# EAGLE board ArduinoFio_Panel_v10a (EAGLE 7.5.0), part 1 of 3
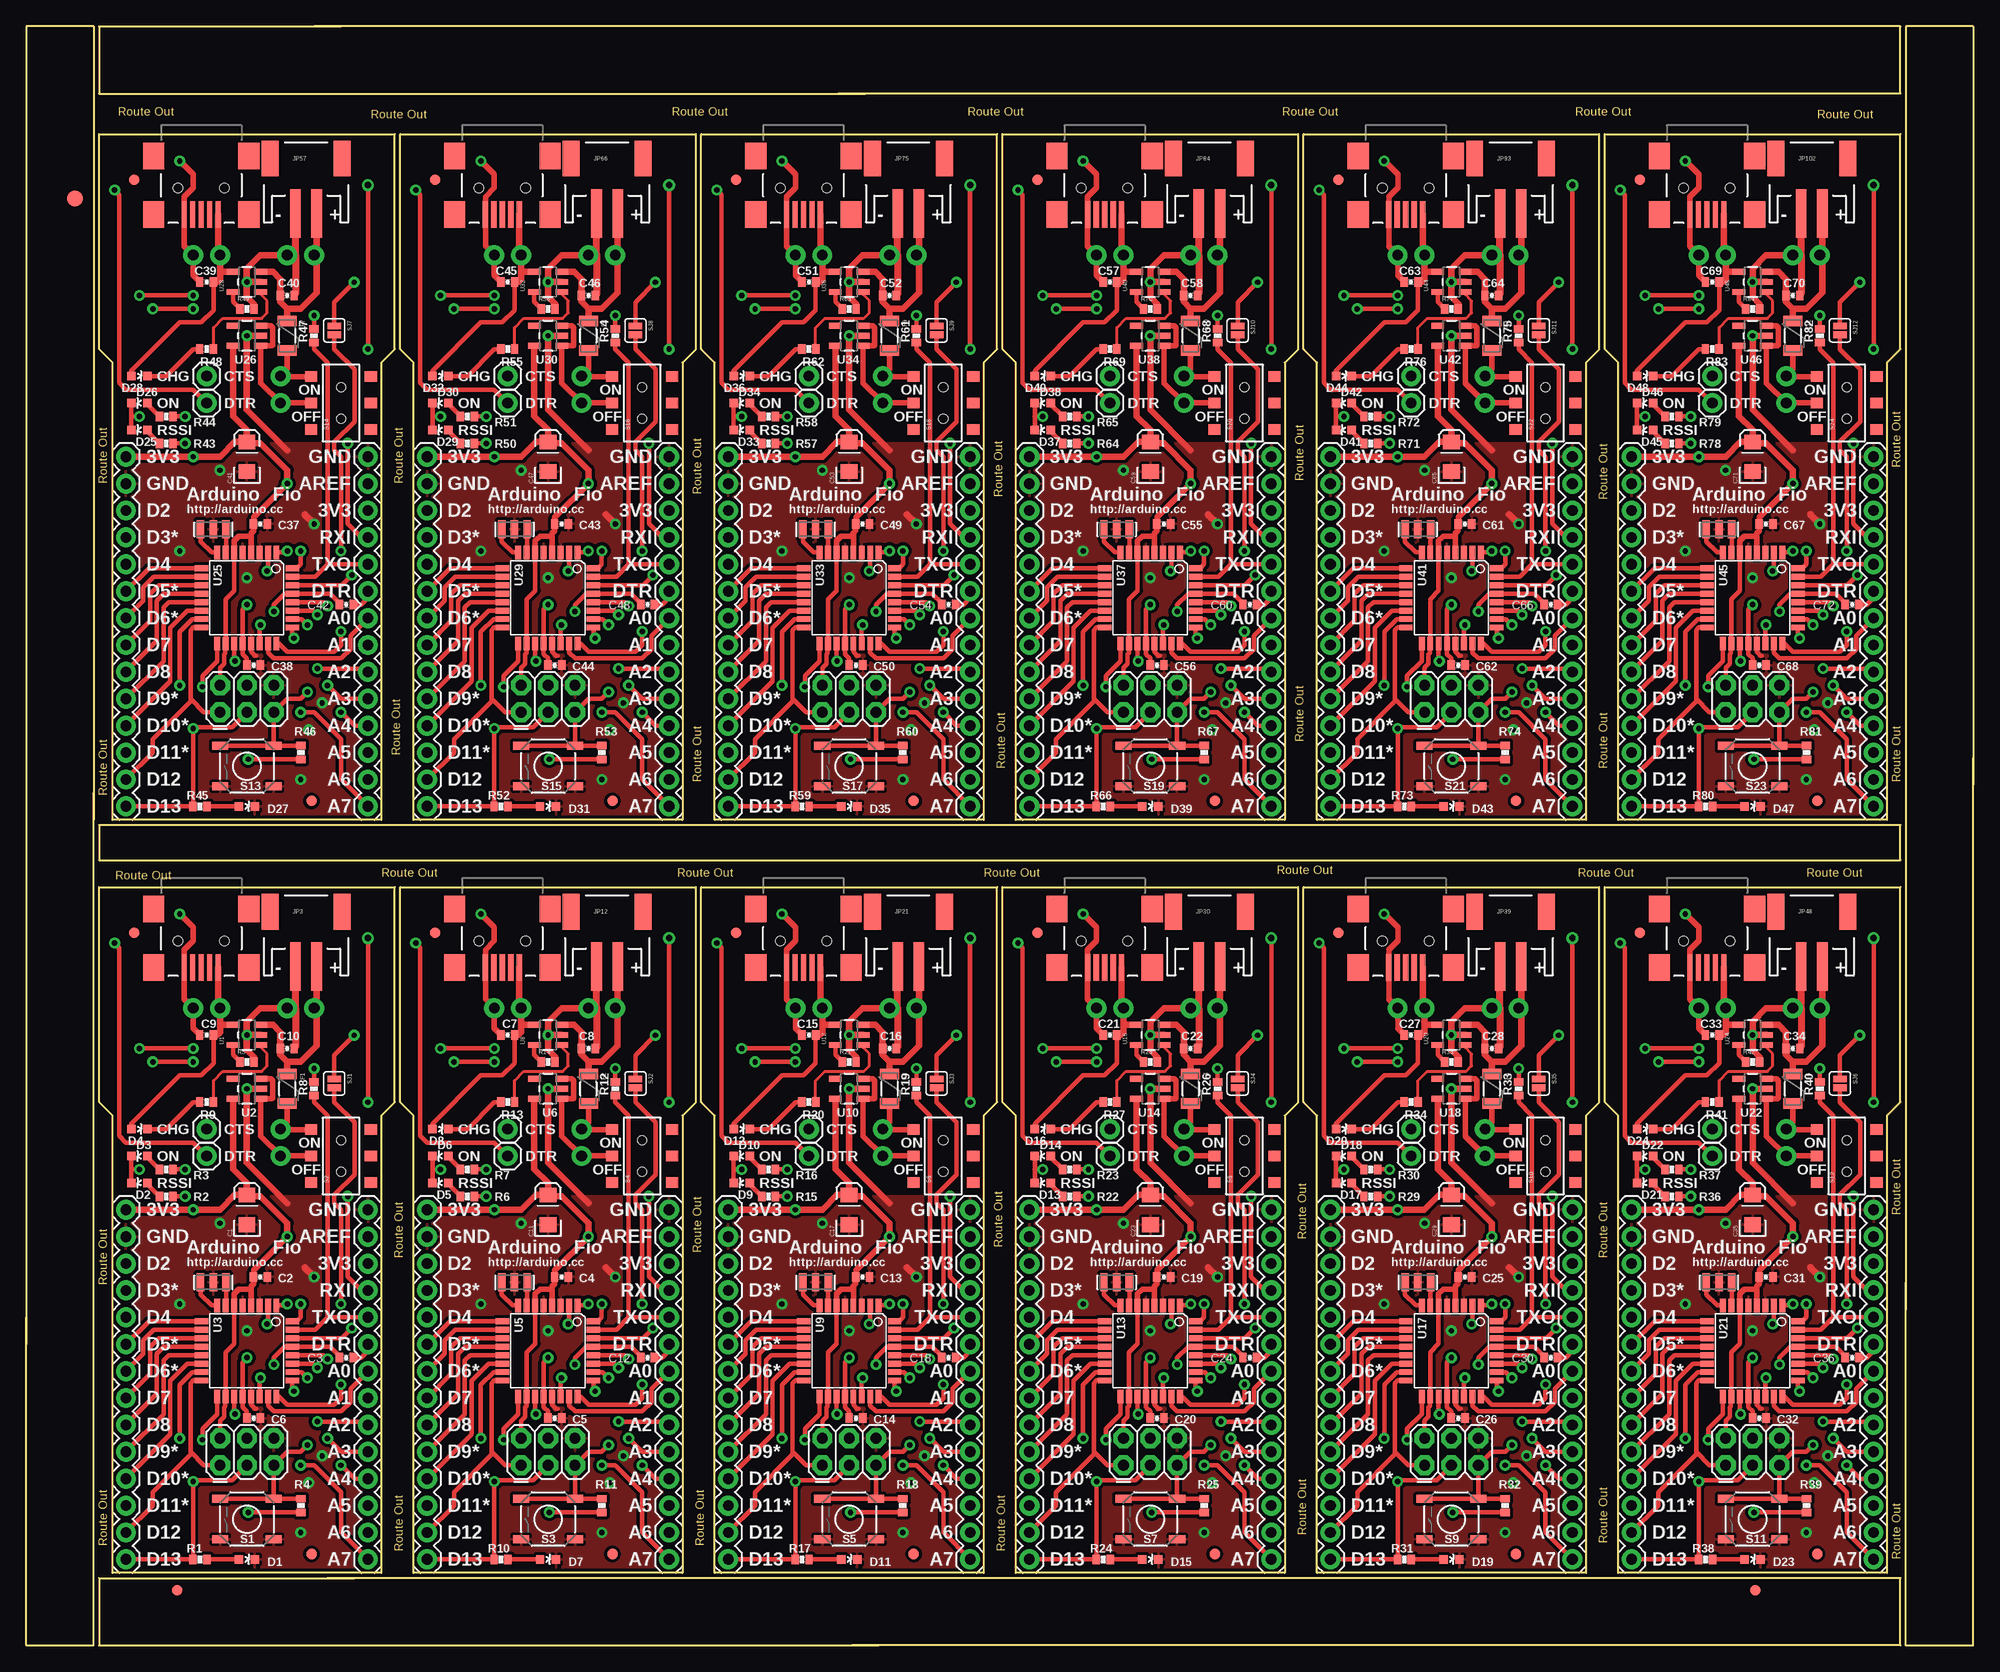
[diagram p0: board, top side]
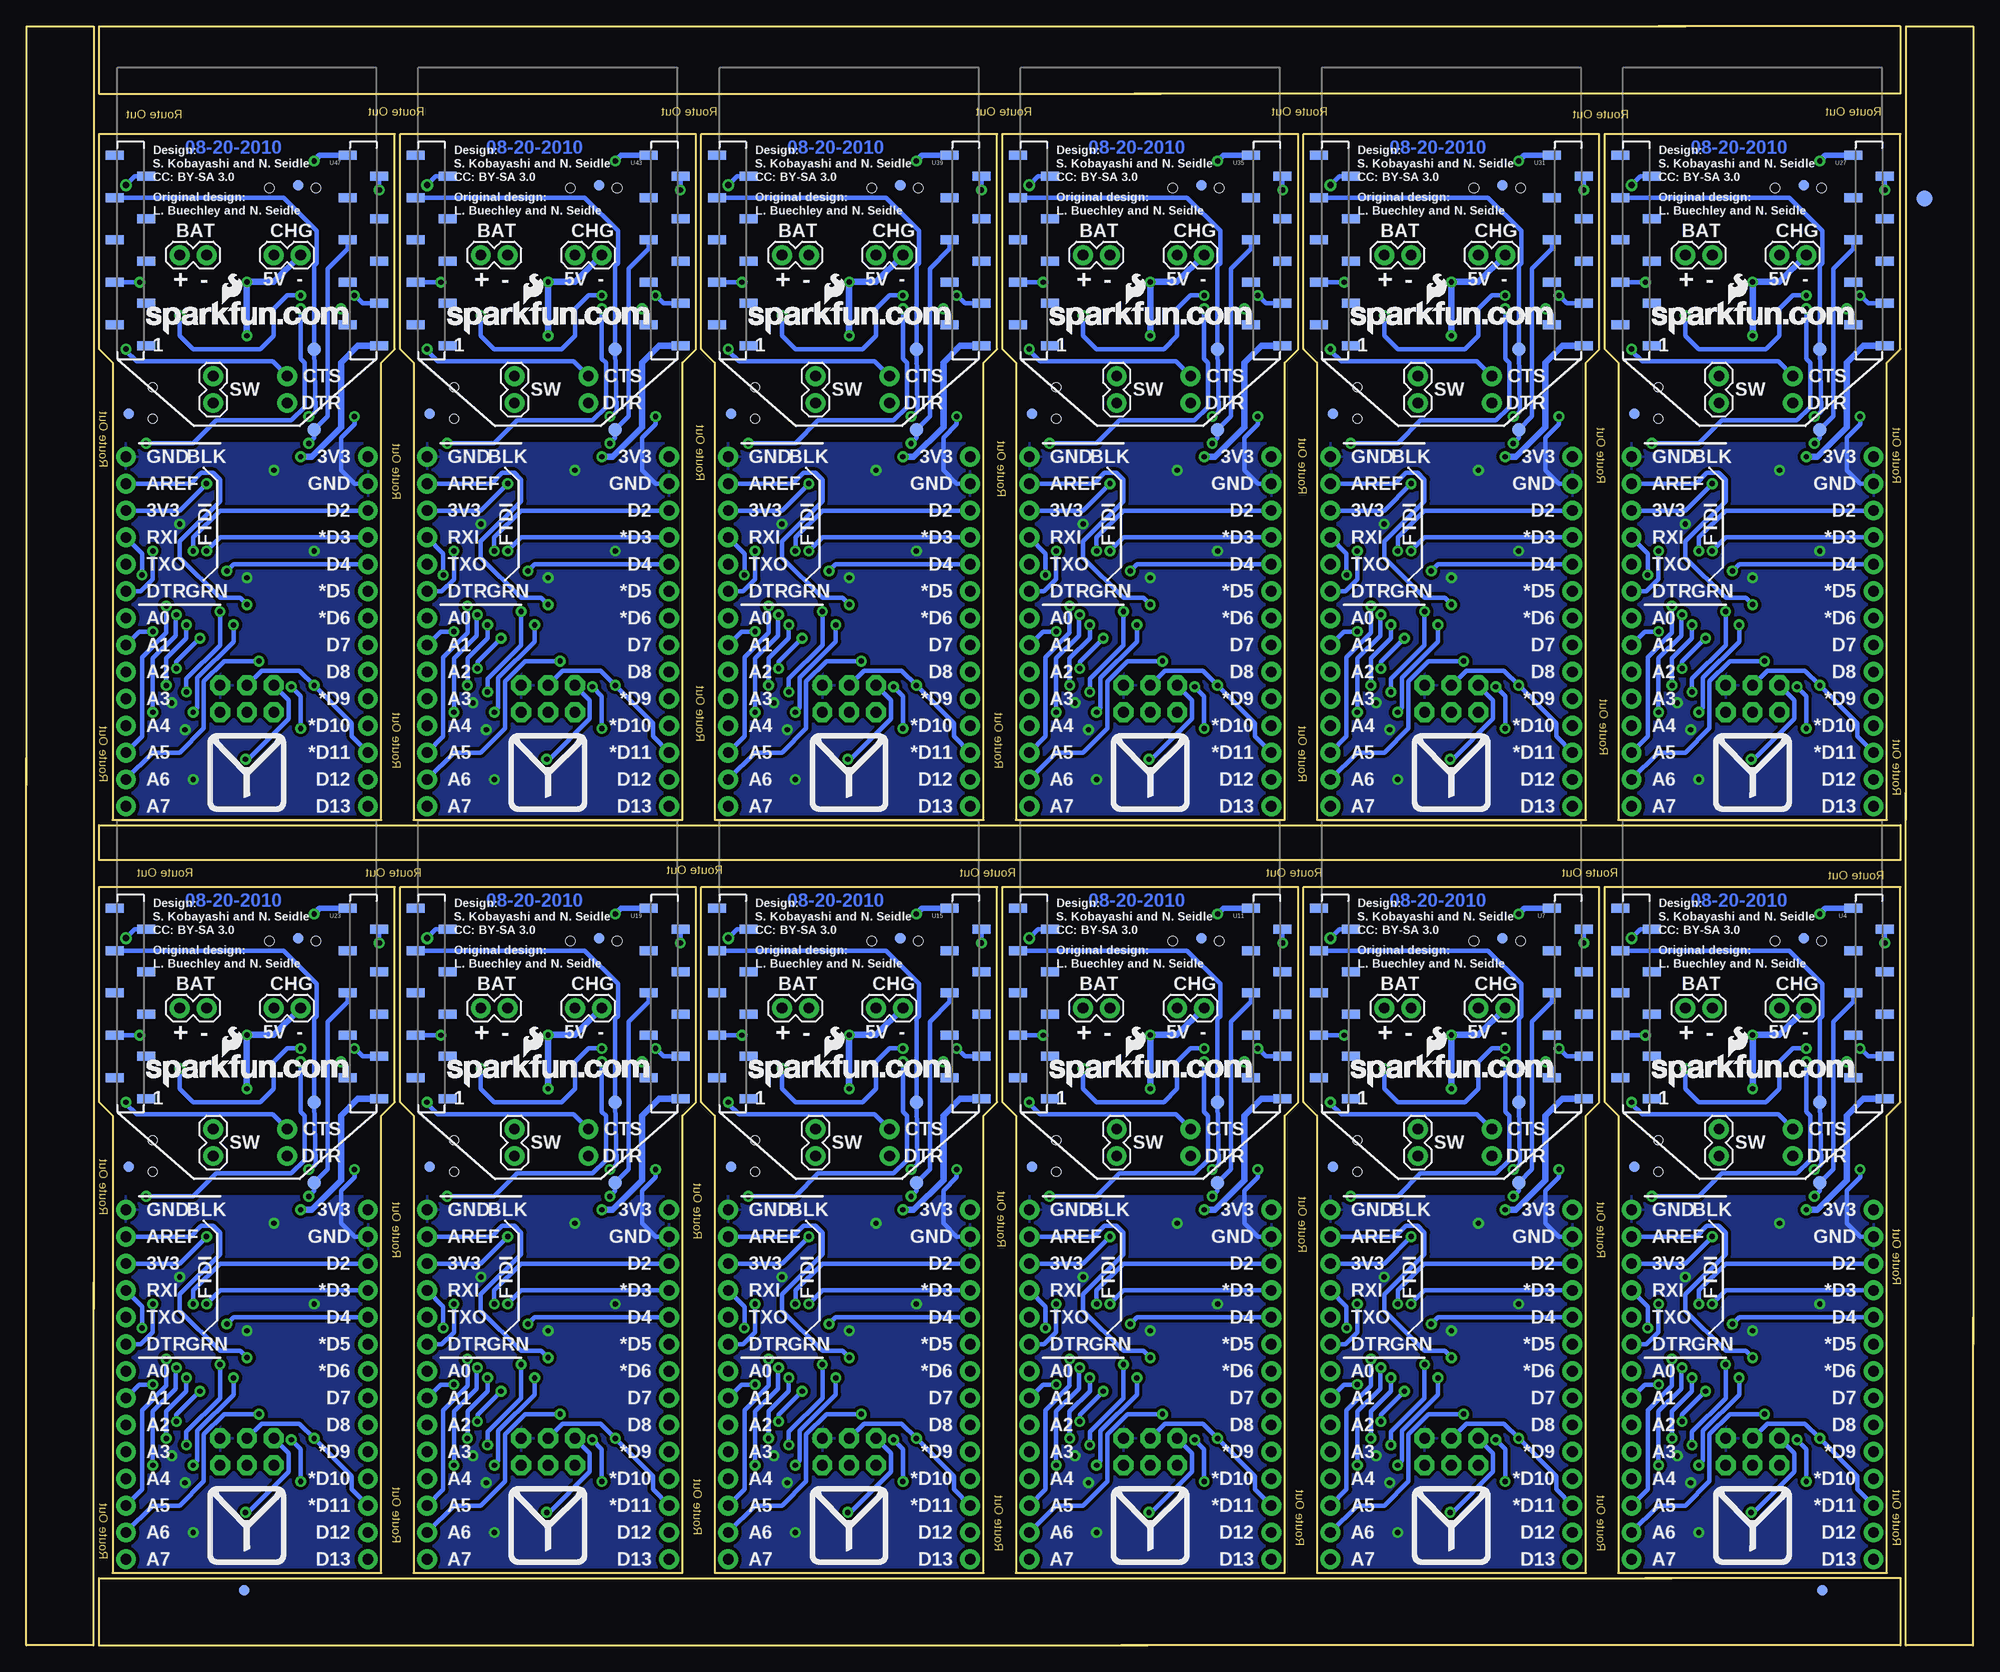
[diagram p1: board, bottom side, seen from below]

Size 183.9 x 152.91 mm. Coordinates in mm from the lower left corner, seen from the top.
Outline: 6.35,80.52 6.35,0 0,0 0,30.99
Outline: 0,28.45 0,152.91 6.35,152.91 6.35,77.98
Outline: 80.52,0 6.86,0 6.86,6.35 30.99,6.35
Outline: 28.45,6.35 177.04,6.35 177.04,0 77.98,0
Outline: 183.9,83.82 183.9,0 177.55,0 177.55,34.29
Outline: 177.55,31.75 177.55,152.91 183.9,152.91 183.9,81.28
Outline: 27.18,152.91 177.04,152.91 177.04,146.56 76.71,146.56
Outline: 79.25,146.56 6.86,146.56 6.86,152.91 29.72,152.91
Outline: 33.53,50.04 33.53,6.86 8.13,6.86 8.13,50.04 6.86,51.31 6.86,71.63 34.8,71.63 34.8,51.31 33.53,50.04
Outline: 61.98,50.04 61.98,6.86 36.58,6.86 36.58,50.04 35.31,51.31 35.31,71.63 63.25,71.63 63.25,51.31 61.98,50.04
Outline: 90.42,50.04 90.42,6.86 65.02,6.86 65.02,50.04 63.75,51.31 63.75,71.63 91.69,71.63 91.69,51.31 90.42,50.04
Outline: 118.87,50.04 118.87,6.86 93.47,6.86 93.47,50.04 92.2,51.31 92.2,71.63 120.14,71.63 120.14,51.31 118.87,50.04
Outline: 147.32,50.04 147.32,6.86 121.92,6.86 121.92,50.04 120.65,51.31 120.65,71.63 148.59,71.63 148.59,51.31 147.32,50.04
Outline: 175.77,50.04 175.77,6.86 150.37,6.86 150.37,50.04 149.1,51.31 149.1,71.63 177.04,71.63 177.04,51.31 175.77,50.04
Outline: 33.53,121.16 33.53,77.98 8.13,77.98 8.13,121.16 6.86,122.43 6.86,142.75 34.8,142.75 34.8,122.43 33.53,121.16
Outline: 61.98,121.16 61.98,77.98 36.58,77.98 36.58,121.16 35.31,122.43 35.31,142.75 63.25,142.75 63.25,122.43 61.98,121.16
Outline: 90.42,121.16 90.42,77.98 65.02,77.98 65.02,121.16 63.75,122.43 63.75,142.75 91.69,142.75 91.69,122.43 90.42,121.16
Outline: 118.87,121.16 118.87,77.98 93.47,77.98 93.47,121.16 92.2,122.43 92.2,142.75 120.14,142.75 120.14,122.43 118.87,121.16
Outline: 147.32,121.16 147.32,77.98 121.92,77.98 121.92,121.16 120.65,122.43 120.65,142.75 148.59,142.75 148.59,122.43 147.32,121.16
Outline: 175.77,121.16 175.77,77.98 150.37,77.98 150.37,121.16 149.1,122.43 149.1,142.75 177.04,142.75 177.04,122.43 175.77,121.16
Outline: 6.86,74.17 177.04,74.17 177.04,77.47 6.86,77.47 6.86,74.17
Copper layers (1*16): Top 0.035mm / dielectric 1.5mm / Bottom 0.035mm
Design rules "SparkFun": minimum track width 8mil, minimum drill 20mil, track to track 8mil, track to pad 8mil, pad to pad 8mil, via to via 8mil, smd to smd 8mil, copper to edge 8mil, drill to drill 8mil, minimum pad ring 12mil, minimum via ring 10mil, stop-mask expansion 4mil, vias tented up to drill 20mil, thermal gap 10mil
Net classes: 0 Default: width 0.203 mm; 1 VCC: width 0.381 mm; 2 LEDPower: width 0.203 mm; 3 ButtonSignal: width 0.203 mm

## Footprints (pad centres in the part's own frame; a part is rotated, then mirrored left to right if it is on the bottom)
EIA3216 = smd 1.4 x 1.6: A 1.4,0; C -1.4,0
0402-CAP = smd 0.7 x 0.9: 1 -0.65,0; 2 0.65,0
LED-0603 = smd 0.8 x 0.8: A 0,-0.75; C 0,0.75
FIDUCIAL-1.5X3 = smd 1.5 x 1.5: 1 0,0
FIDUCIAL-1X2 = smd 1 x 1: 1 0,0
PTC-1206 = smd 1 x 1.8: 1 -1.4,0; 2 1.4,0
1X14 = drill 1.016 pad 1.88: 1 0,0; 2 2.54,0; 3 5.08,0; 4 7.62,0; 5 10.16,0; 6 12.7,0; 7 15.24,0; 8 17.78,0; 9 20.32,0; 10 22.86,0; 11 25.4,0; 12 27.94,0; 13 30.48,0; 14 33.02,0
1X02 = drill 1.016 pad 1.88: 1 0,0; 2 2.54,0
JST-2-SMD = smd 1 x 4.6: 1 -1,-3.7; 2 1,-3.7 | smd 1.6 x 3.4: NC1 -3.4,1.5; NC2 3.4,1.5
2X3 = drill 1.016 pad 1.88 octagon: 1 0,0; 2 0,2.54; 3 2.54,0; 4 2.54,2.54; 5 5.08,0; 6 5.08,2.54
1X01 = drill 1.016 pad 1.88: 1 0,0
0402-RES = smd 0.7 x 0.9: 1 -0.65,0; 2 0.65,0
TACTILE_SWITCH_SMD = smd 1.524 x 0.762: 1 -2.54,1.905; 2 2.54,1.905; 3 -2.54,-1.905; 4 2.54,-1.905
AYZ0202 = smd 1 x 1.15: 1 -2.5,2.825; 2 0,2.825; 3 2.5,2.825; 4 -2.5,-2.825; 5 0,-2.825; 6 2.5,-2.825 | hole 0.85: 1.5,0; -1.5,0
SJ_2S = smd 0.635 x 1.27: 1 -0.412,0; 2 0.412,0
PAD.03X.05 = smd 1.27 x 1.27: P$1 0,0
SOT23-5 = smd 0.55 x 1.2: 1 -0.95,-1.3; 2 0,-1.3; 3 0.95,-1.3; 4 0.95,1.3; 5 -0.95,1.3
TQFP32-08 = smd 1.27 x 0.559: 1 -4.293,2.8; 2 -4.293,2; 3 -4.293,1.2; 4 -4.293,0.4; 5 -4.293,-0.4; 6 -4.293,-1.2; 7 -4.293,-2; 8 -4.293,-2.8; 17 4.293,-2.8; 18 4.293,-2; 19 4.293,-1.2; 20 4.293,-0.4; 21 4.293,0.4; 22 4.293,1.2; 23 4.293,2; 24 4.293,2.8 | smd 0.559 x 1.27: 9 -2.8,-4.293; 10 -2,-4.293; 11 -1.2,-4.293; 12 -0.4,-4.293; 13 0.4,-4.293; 14 1.2,-4.293; 15 2,-4.293; 16 2.8,-4.293; 25 2.8,4.293; 26 2,4.293; 27 1.2,4.293; 28 0.4,4.293; 29 -0.4,4.293; 30 -1.2,4.293; 31 -2,4.293; 32 -2.8,4.293
XBEE-SMD = smd 1.7 x 0.85: 1 -12.5,20; 2 -9.5,18; 3 -12.5,16; 4 -9.5,14; 5 -12.5,12; 6 -9.5,10; 7 -12.5,8; 8 -9.5,6; 9 -12.5,4; 10 -9.5,2; 11 12.5,2; 12 9.5,4; 13 12.5,6; 14 9.5,8; 15 12.5,10; 16 9.5,12; 17 12.5,14; 18 9.5,16; 19 12.5,18; 20 9.5,20
USB-MINIB = smd 2.5 x 0.5: D+ 2.5,0; D- 2.5,0.8; GND 2.5,-1.6; ID 2.5,-0.8; VBUS 2.5,1.6 | smd 2.5 x 2: MTN1 -3,4.5; MTN2 2.5,4.5; MTN3 -3,-4.5; MTN4 2.5,-4.5 | hole 0.9: 0,2.2; 0,-2.2
RESONATOR-SMD = smd 0.7 x 1.7: 1 -1.2,0; 2 0,0; 3 1.2,0

## Placement (x,y rotation side)
C1  10uF  [EIA3216]  20.83,41.15 90 top
C2  0.1uF  [0402-CAP]  22.1,34.8 0 top
C3  0.1uF  [0402-CAP]  30.23,27.18 180 top
C4  0.1uF  [0402-CAP]  50.55,34.8 0 top
C5  0.1uF  [0402-CAP]  49.91,21.46 0 top
C6  0.1uF  [0402-CAP]  21.46,21.46 0 top
C7  4.7uF  [0402-CAP]  45.47,57.66 180 top
C8  4.7uF  [0402-CAP]  53.09,56.39 0 top
C9  4.7uF  [0402-CAP]  17.02,57.66 180 top
C10  4.7uF  [0402-CAP]  24.64,56.39 0 top
C11  10uF  [EIA3216]  49.28,41.15 90 top
C12  0.1uF  [0402-CAP]  58.67,27.18 180 top
C13  0.1uF  [0402-CAP]  78.99,34.8 0 top
C14  0.1uF  [0402-CAP]  78.36,21.46 0 top
C15  4.7uF  [0402-CAP]  73.91,57.66 180 top
C16  4.7uF  [0402-CAP]  81.53,56.39 0 top
C17  10uF  [EIA3216]  77.72,41.15 90 top
C18  0.1uF  [0402-CAP]  87.12,27.18 180 top
C19  0.1uF  [0402-CAP]  107.44,34.8 0 top
C20  0.1uF  [0402-CAP]  106.81,21.46 0 top
C21  4.7uF  [0402-CAP]  102.36,57.66 180 top
C22  4.7uF  [0402-CAP]  109.98,56.39 0 top
C23  10uF  [EIA3216]  106.17,41.15 90 top
C24  0.1uF  [0402-CAP]  115.57,27.18 180 top
C25  0.1uF  [0402-CAP]  135.89,34.8 0 top
C26  0.1uF  [0402-CAP]  135.25,21.46 0 top
C27  4.7uF  [0402-CAP]  130.81,57.66 180 top
C28  4.7uF  [0402-CAP]  138.43,56.39 0 top
C29  10uF  [EIA3216]  134.62,41.15 90 top
C30  0.1uF  [0402-CAP]  144.02,27.18 180 top
C31  0.1uF  [0402-CAP]  164.34,34.8 0 top
C32  0.1uF  [0402-CAP]  163.7,21.46 0 top
C33  4.7uF  [0402-CAP]  159.26,57.66 180 top
C34  4.7uF  [0402-CAP]  166.88,56.39 0 top
C35  10uF  [EIA3216]  163.07,41.15 90 top
C36  0.1uF  [0402-CAP]  172.47,27.18 180 top
C37  0.1uF  [0402-CAP]  22.1,105.92 0 top
C38  0.1uF  [0402-CAP]  21.46,92.58 0 top
C39  4.7uF  [0402-CAP]  17.02,128.78 180 top
C40  4.7uF  [0402-CAP]  24.64,127.51 0 top
C41  10uF  [EIA3216]  20.83,112.27 90 top
C42  0.1uF  [0402-CAP]  30.23,98.3 180 top
C43  0.1uF  [0402-CAP]  50.55,105.92 0 top
C44  0.1uF  [0402-CAP]  49.91,92.58 0 top
C45  4.7uF  [0402-CAP]  45.47,128.78 180 top
C46  4.7uF  [0402-CAP]  53.09,127.51 0 top
C47  10uF  [EIA3216]  49.28,112.27 90 top
C48  0.1uF  [0402-CAP]  58.67,98.3 180 top
C49  0.1uF  [0402-CAP]  78.99,105.92 0 top
C50  0.1uF  [0402-CAP]  78.36,92.58 0 top
C51  4.7uF  [0402-CAP]  73.91,128.78 180 top
C52  4.7uF  [0402-CAP]  81.53,127.51 0 top
C53  10uF  [EIA3216]  77.72,112.27 90 top
C54  0.1uF  [0402-CAP]  87.12,98.3 180 top
C55  0.1uF  [0402-CAP]  107.44,105.92 0 top
C56  0.1uF  [0402-CAP]  106.81,92.58 0 top
C57  4.7uF  [0402-CAP]  102.36,128.78 180 top
C58  4.7uF  [0402-CAP]  109.98,127.51 0 top
C59  10uF  [EIA3216]  106.17,112.27 90 top
C60  0.1uF  [0402-CAP]  115.57,98.3 180 top
C61  0.1uF  [0402-CAP]  135.89,105.92 0 top
C62  0.1uF  [0402-CAP]  135.25,92.58 0 top
C63  4.7uF  [0402-CAP]  130.81,128.78 180 top
C64  4.7uF  [0402-CAP]  138.43,127.51 0 top
C65  10uF  [EIA3216]  134.62,112.27 90 top
C66  0.1uF  [0402-CAP]  144.02,98.3 180 top
C67  0.1uF  [0402-CAP]  164.34,105.92 0 top
C68  0.1uF  [0402-CAP]  163.7,92.58 0 top
C69  4.7uF  [0402-CAP]  159.26,128.78 180 top
C70  4.7uF  [0402-CAP]  166.88,127.51 0 top
C71  10uF  [EIA3216]  163.07,112.27 90 top
C72  0.1uF  [0402-CAP]  172.47,98.3 180 top
D1  Red  [LED-0603]  20.83,8.13 270 top
D2  Green  [LED-0603]  10.67,43.69 90 top
D3  Red  [LED-0603]  10.67,46.23 90 top
D4  Yellow  [LED-0603]  10.67,48.77 270 top
D5  Green  [LED-0603]  39.12,43.69 90 top
D6  Red  [LED-0603]  39.12,46.23 90 top
D7  Red  [LED-0603]  49.28,8.13 270 top
D8  Yellow  [LED-0603]  39.12,48.77 270 top
D9  Green  [LED-0603]  67.56,43.69 90 top
D10  Red  [LED-0603]  67.56,46.23 90 top
D11  Red  [LED-0603]  77.72,8.13 270 top
D12  Yellow  [LED-0603]  67.56,48.77 270 top
D13  Green  [LED-0603]  96.01,43.69 90 top
D14  Red  [LED-0603]  96.01,46.23 90 top
D15  Red  [LED-0603]  106.17,8.13 270 top
D16  Yellow  [LED-0603]  96.01,48.77 270 top
D17  Green  [LED-0603]  124.46,43.69 90 top
D18  Red  [LED-0603]  124.46,46.23 90 top
D19  Red  [LED-0603]  134.62,8.13 270 top
D20  Yellow  [LED-0603]  124.46,48.77 270 top
D21  Green  [LED-0603]  152.91,43.69 90 top
D22  Red  [LED-0603]  152.91,46.23 90 top
D23  Red  [LED-0603]  163.07,8.13 270 top
D24  Yellow  [LED-0603]  152.91,48.77 270 top
D25  Green  [LED-0603]  10.67,114.81 90 top
D26  Red  [LED-0603]  10.67,117.35 90 top
D27  Red  [LED-0603]  20.83,79.25 270 top
D28  Yellow  [LED-0603]  10.67,119.89 270 top
D29  Green  [LED-0603]  39.12,114.81 90 top
D30  Red  [LED-0603]  39.12,117.35 90 top
D31  Red  [LED-0603]  49.28,79.25 270 top
D32  Yellow  [LED-0603]  39.12,119.89 270 top
D33  Green  [LED-0603]  67.56,114.81 90 top
D34  Red  [LED-0603]  67.56,117.35 90 top
D35  Red  [LED-0603]  77.72,79.25 270 top
D36  Yellow  [LED-0603]  67.56,119.89 270 top
D37  Green  [LED-0603]  96.01,114.81 90 top
D38  Red  [LED-0603]  96.01,117.35 90 top
D39  Red  [LED-0603]  106.17,79.25 270 top
D40  Yellow  [LED-0603]  96.01,119.89 270 top
D41  Green  [LED-0603]  124.46,114.81 90 top
D42  Red  [LED-0603]  124.46,117.35 90 top
D43  Red  [LED-0603]  134.62,79.25 270 top
D44  Yellow  [LED-0603]  124.46,119.89 270 top
D45  Green  [LED-0603]  152.91,114.81 90 top
D46  Red  [LED-0603]  152.91,117.35 90 top
D47  Red  [LED-0603]  163.07,79.25 270 top
D48  Yellow  [LED-0603]  152.91,119.89 270 top
E$1  [FIDUCIAL-1.5X3]  4.57,136.65 0 top
E$2  [FIDUCIAL-1.5X3]  4.57,136.65 0 bottom
E$3  [FIDUCIAL-1X2]  14.22,5.21 270 bottom
E$4  [FIDUCIAL-1X2]  163.32,5.21 90 bottom
E$7  [FIDUCIAL-1X2]  14.22,5.21 270 top
E$8  [FIDUCIAL-1X2]  163.32,5.21 90 top
F1  PTCSMD  [PTC-1206]  24.64,52.58 270 top
F2  PTCSMD  [PTC-1206]  53.09,52.58 270 top
F3  PTCSMD  [PTC-1206]  81.53,52.58 270 top
F4  PTCSMD  [PTC-1206]  109.98,52.58 270 top
F5  PTCSMD  [PTC-1206]  138.43,52.58 270 top
F6  PTCSMD  [PTC-1206]  166.88,52.58 270 top
F7  PTCSMD  [PTC-1206]  24.64,123.7 270 top
F8  PTCSMD  [PTC-1206]  53.09,123.7 270 top
F9  PTCSMD  [PTC-1206]  81.53,123.7 270 top
F10  PTCSMD  [PTC-1206]  109.98,123.7 270 top
F11  PTCSMD  [PTC-1206]  138.43,123.7 270 top
F12  PTCSMD  [PTC-1206]  166.88,123.7 270 top
FD1  FIDUCIAL1X2  [FIDUCIAL-1X2]  32,45.21 0 bottom
FD2  FIDUCIAL1X2  [FIDUCIAL-1X2]  16,66.8 0 bottom
FD3  FIDUCIAL1X2  [FIDUCIAL-1X2]  60.45,45.21 0 bottom
FD4  FIDUCIAL1X2  [FIDUCIAL-1X2]  44.45,66.8 0 bottom
FD5  FIDUCIAL1X2  [FIDUCIAL-1X2]  88.9,45.21 0 bottom
FD6  FIDUCIAL1X2  [FIDUCIAL-1X2]  72.9,66.8 0 bottom
FD7  FIDUCIAL1X2  [FIDUCIAL-1X2]  117.35,45.21 0 bottom
FD8  FIDUCIAL1X2  [FIDUCIAL-1X2]  101.35,66.8 0 bottom
FD9  FIDUCIAL1X2  [FIDUCIAL-1X2]  145.8,45.21 0 bottom
FD10  FIDUCIAL1X2  [FIDUCIAL-1X2]  129.79,66.8 0 bottom
FD11  FIDUCIAL1X2  [FIDUCIAL-1X2]  174.24,45.21 0 bottom
FD12  FIDUCIAL1X2  [FIDUCIAL-1X2]  158.24,66.8 0 bottom
FD13  FIDUCIAL1X2  [FIDUCIAL-1X2]  32,116.33 0 bottom
FD14  FIDUCIAL1X2  [FIDUCIAL-1X2]  16,137.92 0 bottom
FD15  FIDUCIAL1X2  [FIDUCIAL-1X2]  60.45,116.33 0 bottom
FD16  FIDUCIAL1X2  [FIDUCIAL-1X2]  44.45,137.92 0 bottom
FD17  FIDUCIAL1X2  [FIDUCIAL-1X2]  88.9,116.33 0 bottom
FD18  FIDUCIAL1X2  [FIDUCIAL-1X2]  72.9,137.92 0 bottom
FD19  FIDUCIAL1X2  [FIDUCIAL-1X2]  117.35,116.33 0 bottom
FD20  FIDUCIAL1X2  [FIDUCIAL-1X2]  101.35,137.92 0 bottom
FD21  FIDUCIAL1X2  [FIDUCIAL-1X2]  145.8,116.33 0 bottom
FD22  FIDUCIAL1X2  [FIDUCIAL-1X2]  129.79,137.92 0 bottom
FD23  FIDUCIAL1X2  [FIDUCIAL-1X2]  174.24,116.33 0 bottom
FD24  FIDUCIAL1X2  [FIDUCIAL-1X2]  158.24,137.92 0 bottom
JP1  M14  [1X14]  9.4,41.15 270 top
JP2  [1X02]  24.64,60.2 180 bottom
JP3  [JST-2-SMD]  26.42,67.82 0 top
JP4  AVR_SPI  [2X3]  18.29,17.02 0 top
JP5  M14  [1X14]  32.26,41.15 270 top
JP6  [1X02]  15.75,60.2 180 bottom
JP7  [1X02]  24,46.23 90 bottom
JP8  [1X01]  17.02,48.77 0 top
JP9  [1X01]  17.02,46.23 0 top
JP10  AVR_SPI  [2X3]  46.74,17.02 0 top
JP11  M14  [1X14]  37.85,41.15 270 top
JP12  [JST-2-SMD]  54.86,67.82 0 top
JP13  M14  [1X14]  60.71,41.15 270 top
JP14  [1X02]  53.09,60.2 180 bottom
JP15  [1X02]  44.2,60.2 180 bottom
JP16  [1X02]  52.45,46.23 90 bottom
JP17  [1X01]  45.47,48.77 0 top
JP18  [1X01]  45.47,46.23 0 top
JP19  AVR_SPI  [2X3]  75.18,17.02 0 top
JP20  M14  [1X14]  66.29,41.15 270 top
JP21  [JST-2-SMD]  83.31,67.82 0 top
JP22  M14  [1X14]  89.15,41.15 270 top
JP23  [1X02]  81.53,60.2 180 bottom
JP24  [1X02]  72.64,60.2 180 bottom
JP25  [1X02]  80.9,46.23 90 bottom
JP26  [1X01]  73.91,48.77 0 top
JP27  [1X01]  73.91,46.23 0 top
JP28  AVR_SPI  [2X3]  103.63,17.02 0 top
JP29  M14  [1X14]  94.74,41.15 270 top
JP30  [JST-2-SMD]  111.76,67.82 0 top
JP31  M14  [1X14]  117.6,41.15 270 top
JP32  [1X02]  109.98,60.2 180 bottom
JP33  [1X02]  101.09,60.2 180 bottom
JP34  [1X02]  109.35,46.23 90 bottom
JP35  [1X01]  102.36,48.77 0 top
JP36  [1X01]  102.36,46.23 0 top
JP37  AVR_SPI  [2X3]  132.08,17.02 0 top
JP38  M14  [1X14]  123.19,41.15 270 top
JP39  [JST-2-SMD]  140.21,67.82 0 top
JP40  M14  [1X14]  146.05,41.15 270 top
JP41  [1X02]  138.43,60.2 180 bottom
JP42  [1X02]  129.54,60.2 180 bottom
JP43  [1X02]  137.79,46.23 90 bottom
JP44  [1X01]  130.81,48.77 0 top
JP45  [1X01]  130.81,46.23 0 top
JP46  AVR_SPI  [2X3]  160.53,17.02 0 top
JP47  M14  [1X14]  151.64,41.15 270 top
JP48  [JST-2-SMD]  168.66,67.82 0 top
JP49  M14  [1X14]  174.5,41.15 270 top
JP50  [1X02]  166.88,60.2 180 bottom
JP51  [1X02]  157.99,60.2 180 bottom
JP52  [1X02]  166.24,46.23 90 bottom
JP53  [1X01]  159.26,48.77 0 top
JP54  [1X01]  159.26,46.23 0 top
JP55  AVR_SPI  [2X3]  18.29,88.14 0 top
JP56  M14  [1X14]  9.4,112.27 270 top
JP57  [JST-2-SMD]  26.42,138.94 0 top
JP58  M14  [1X14]  32.26,112.27 270 top
JP59  [1X02]  24.64,131.32 180 bottom
JP60  [1X02]  15.75,131.32 180 bottom
JP61  [1X02]  24,117.35 90 bottom
JP62  [1X01]  17.02,119.89 0 top
JP63  [1X01]  17.02,117.35 0 top
JP64  AVR_SPI  [2X3]  46.74,88.14 0 top
JP65  M14  [1X14]  37.85,112.27 270 top
JP66  [JST-2-SMD]  54.86,138.94 0 top
JP67  M14  [1X14]  60.71,112.27 270 top
JP68  [1X02]  53.09,131.32 180 bottom
JP69  [1X02]  44.2,131.32 180 bottom
JP70  [1X02]  52.45,117.35 90 bottom
JP71  [1X01]  45.47,119.89 0 top
JP72  [1X01]  45.47,117.35 0 top
JP73  AVR_SPI  [2X3]  75.18,88.14 0 top
JP74  M14  [1X14]  66.29,112.27 270 top
JP75  [JST-2-SMD]  83.31,138.94 0 top
JP76  M14  [1X14]  89.15,112.27 270 top
JP77  [1X02]  81.53,131.32 180 bottom
JP78  [1X02]  72.64,131.32 180 bottom
JP79  [1X02]  80.9,117.35 90 bottom
JP80  [1X01]  73.91,119.89 0 top
JP81  [1X01]  73.91,117.35 0 top
JP82  AVR_SPI  [2X3]  103.63,88.14 0 top
JP83  M14  [1X14]  94.74,112.27 270 top
JP84  [JST-2-SMD]  111.76,138.94 0 top
JP85  M14  [1X14]  117.6,112.27 270 top
JP86  [1X02]  109.98,131.32 180 bottom
JP87  [1X02]  101.09,131.32 180 bottom
JP88  [1X02]  109.35,117.35 90 bottom
JP89  [1X01]  102.36,119.89 0 top
JP90  [1X01]  102.36,117.35 0 top
JP91  AVR_SPI  [2X3]  132.08,88.14 0 top
JP92  M14  [1X14]  123.19,112.27 270 top
JP93  [JST-2-SMD]  140.21,138.94 0 top
JP94  M14  [1X14]  146.05,112.27 270 top
JP95  [1X02]  138.43,131.32 180 bottom
JP96  [1X02]  129.54,131.32 180 bottom
JP97  [1X02]  137.79,117.35 90 bottom
JP98  [1X01]  130.81,119.89 0 top
JP99  [1X01]  130.81,117.35 0 top
JP100  AVR_SPI  [2X3]  160.53,88.14 0 top
JP101  M14  [1X14]  151.64,112.27 270 top
JP102  [JST-2-SMD]  168.66,138.94 0 top
JP103  M14  [1X14]  174.5,112.27 270 top
JP104  [1X02]  166.88,131.32 180 bottom
JP105  [1X02]  157.99,131.32 180 bottom
JP106  [1X02]  166.24,117.35 90 bottom
JP107  [1X01]  159.26,119.89 0 top
JP108  [1X01]  159.26,117.35 0 top
R1  1k  [0402-RES]  16.38,8.13 0 top
R2  1k  [0402-RES]  13.21,42.42 0 top
R3  1k  [0402-RES]  13.21,44.96 0 top
R4  10k  [0402-RES]  25.91,13.21 270 top
R5  2K  [0402-RES]  20.83,55.12 0 top
R6  1k  [0402-RES]  41.66,42.42 0 top
R7  1k  [0402-RES]  41.66,44.96 0 top
R8  100  [0402-RES]  27.18,52.58 90 top
R9  470  [0402-RES]  17.02,51.31 180 top
R10  1k  [0402-RES]  44.83,8.13 0 top
R11  10k  [0402-RES]  54.36,13.21 270 top
R12  100  [0402-RES]  55.63,52.58 90 top
R13  470  [0402-RES]  45.47,51.31 180 top
R14  2K  [0402-RES]  49.28,55.12 0 top
R15  1k  [0402-RES]  70.1,42.42 0 top
R16  1k  [0402-RES]  70.1,44.96 0 top
R17  1k  [0402-RES]  73.28,8.13 0 top
R18  10k  [0402-RES]  82.8,13.21 270 top
R19  100  [0402-RES]  84.07,52.58 90 top
R20  470  [0402-RES]  73.91,51.31 180 top
R21  2K  [0402-RES]  77.72,55.12 0 top
R22  1k  [0402-RES]  98.55,42.42 0 top
R23  1k  [0402-RES]  98.55,44.96 0 top
R24  1k  [0402-RES]  101.73,8.13 0 top
R25  10k  [0402-RES]  111.25,13.21 270 top
R26  100  [0402-RES]  112.52,52.58 90 top
R27  470  [0402-RES]  102.36,51.31 180 top
R28  2K  [0402-RES]  106.17,55.12 0 top
R29  1k  [0402-RES]  127,42.42 0 top
R30  1k  [0402-RES]  127,44.96 0 top
R31  1k  [0402-RES]  130.18,8.13 0 top
R32  10k  [0402-RES]  139.7,13.21 270 top
R33  100  [0402-RES]  140.97,52.58 90 top
R34  470  [0402-RES]  130.81,51.31 180 top
R35  2K  [0402-RES]  134.62,55.12 0 top
R36  1k  [0402-RES]  155.45,42.42 0 top
R37  1k  [0402-RES]  155.45,44.96 0 top
R38  1k  [0402-RES]  158.62,8.13 0 top
R39  10k  [0402-RES]  168.15,13.21 270 top
R40  100  [0402-RES]  169.42,52.58 90 top
R41  470  [0402-RES]  159.26,51.31 180 top
R42  2K  [0402-RES]  163.07,55.12 0 top
R43  1k  [0402-RES]  13.21,113.54 0 top
R44  1k  [0402-RES]  13.21,116.08 0 top
R45  1k  [0402-RES]  16.38,79.25 0 top
R46  10k  [0402-RES]  25.91,84.33 270 top
R47  100  [0402-RES]  27.18,123.7 90 top
R48  470  [0402-RES]  17.02,122.43 180 top
R49  2K  [0402-RES]  20.83,126.24 0 top
R50  1k  [0402-RES]  41.66,113.54 0 top
R51  1k  [0402-RES]  41.66,116.08 0 top
R52  1k  [0402-RES]  44.83,79.25 0 top
R53  10k  [0402-RES]  54.36,84.33 270 top
R54  100  [0402-RES]  55.63,123.7 90 top
R55  470  [0402-RES]  45.47,122.43 180 top
R56  2K  [0402-RES]  49.28,126.24 0 top
R57  1k  [0402-RES]  70.1,113.54 0 top
R58  1k  [0402-RES]  70.1,116.08 0 top
R59  1k  [0402-RES]  73.28,79.25 0 top
R60  10k  [0402-RES]  82.8,84.33 270 top
R61  100  [0402-RES]  84.07,123.7 90 top
R62  470  [0402-RES]  73.91,122.43 180 top
R63  2K  [0402-RES]  77.72,126.24 0 top
R64  1k  [0402-RES]  98.55,113.54 0 top
R65  1k  [0402-RES]  98.55,116.08 0 top
R66  1k  [0402-RES]  101.73,79.25 0 top
R67  10k  [0402-RES]  111.25,84.33 270 top
R68  100  [0402-RES]  112.52,123.7 90 top
R69  470  [0402-RES]  102.36,122.43 180 top
R70  2K  [0402-RES]  106.17,126.24 0 top
R71  1k  [0402-RES]  127,113.54 0 top
R72  1k  [0402-RES]  127,116.08 0 top
R73  1k  [0402-RES]  130.18,79.25 0 top
R74  10k  [0402-RES]  139.7,84.33 270 top
R75  100  [0402-RES]  140.97,123.7 90 top
R76  470  [0402-RES]  130.81,122.43 180 top
R77  2K  [0402-RES]  134.62,126.24 0 top
R78  1k  [0402-RES]  155.45,113.54 0 top
R79  1k  [0402-RES]  155.45,116.08 0 top
R80  1k  [0402-RES]  158.62,79.25 0 top
R81  10k  [0402-RES]  168.15,84.33 270 top
R82  100  [0402-RES]  169.42,123.7 90 top
R83  470  [0402-RES]  159.26,122.43 180 top
R84  2K  [0402-RES]  163.07,126.24 0 top
S1  [TACTILE_SWITCH_SMD]  20.83,11.94 180 top
S2  [AYZ0202]  29.72,46.23 90 top
S3  [TACTILE_SWITCH_SMD]  49.28,11.94 180 top
S4  [AYZ0202]  58.17,46.23 90 top
S5  [TACTILE_SWITCH_SMD]  77.72,11.94 180 top
S6  [AYZ0202]  86.61,46.23 90 top
S7  [TACTILE_SWITCH_SMD]  106.17,11.94 180 top
S8  [AYZ0202]  115.06,46.23 90 top
S9  [TACTILE_SWITCH_SMD]  134.62,11.94 180 top
S10  [AYZ0202]  143.51,46.23 90 top
S11  [TACTILE_SWITCH_SMD]  163.07,11.94 180 top
S12  [AYZ0202]  171.96,46.23 90 top
S13  [TACTILE_SWITCH_SMD]  20.83,83.06 180 top
S14  [AYZ0202]  29.72,117.35 90 top
S15  [TACTILE_SWITCH_SMD]  49.28,83.06 180 top
S16  [AYZ0202]  58.17,117.35 90 top
S17  [TACTILE_SWITCH_SMD]  77.72,83.06 180 top
S18  [AYZ0202]  86.61,117.35 90 top
S19  [TACTILE_SWITCH_SMD]  106.17,83.06 180 top
S20  [AYZ0202]  115.06,117.35 90 top
S21  [TACTILE_SWITCH_SMD]  134.62,83.06 180 top
S22  [AYZ0202]  143.51,117.35 90 top
S23  [TACTILE_SWITCH_SMD]  163.07,83.06 180 top
S24  [AYZ0202]  171.96,117.35 90 top
SJ1  SOLDERJUMPERNC  [SJ_2S]  29.08,53.09 270 top
SJ2  SOLDERJUMPERNC  [SJ_2S]  57.53,53.09 270 top
SJ3  SOLDERJUMPERNC  [SJ_2S]  85.98,53.09 270 top
SJ4  SOLDERJUMPERNC  [SJ_2S]  114.43,53.09 270 top
SJ5  SOLDERJUMPERNC  [SJ_2S]  142.88,53.09 270 top
SJ6  SOLDERJUMPERNC  [SJ_2S]  171.32,53.09 270 top
SJ7  SOLDERJUMPERNC  [SJ_2S]  29.08,124.21 270 top
SJ8  SOLDERJUMPERNC  [SJ_2S]  57.53,124.21 270 top
SJ9  SOLDERJUMPERNC  [SJ_2S]  85.98,124.21 270 top
SJ10  SOLDERJUMPERNC  [SJ_2S]  114.43,124.21 270 top
SJ11  SOLDERJUMPERNC  [SJ_2S]  142.88,124.21 270 top
SJ12  SOLDERJUMPERNC  [SJ_2S]  171.32,124.21 270 top
TP1  RSSI  [PAD.03X.05]  14.48,43.69 0 bottom
TP2  ON  [PAD.03X.05]  14.48,51.31 0 bottom
TP3  RSSI  [PAD.03X.05]  42.93,43.69 0 bottom
TP4  ON  [PAD.03X.05]  42.93,51.31 0 bottom
TP5  RSSI  [PAD.03X.05]  71.37,43.69 0 bottom
TP6  ON  [PAD.03X.05]  71.37,51.31 0 bottom
TP7  RSSI  [PAD.03X.05]  99.82,43.69 0 bottom
TP8  ON  [PAD.03X.05]  99.82,51.31 0 bottom
TP9  RSSI  [PAD.03X.05]  128.27,43.69 0 bottom
TP10  ON  [PAD.03X.05]  128.27,51.31 0 bottom
TP11  RSSI  [PAD.03X.05]  156.72,43.69 0 bottom
TP12  ON  [PAD.03X.05]  156.72,51.31 0 bottom
TP13  RSSI  [PAD.03X.05]  14.48,114.81 0 bottom
TP14  ON  [PAD.03X.05]  14.48,122.43 0 bottom
TP15  RSSI  [PAD.03X.05]  42.93,114.81 0 bottom
TP16  ON  [PAD.03X.05]  42.93,122.43 0 bottom
TP17  RSSI  [PAD.03X.05]  71.37,114.81 0 bottom
TP18  ON  [PAD.03X.05]  71.37,122.43 0 bottom
TP19  RSSI  [PAD.03X.05]  99.82,114.81 0 bottom
TP20  ON  [PAD.03X.05]  99.82,122.43 0 bottom
TP21  RSSI  [PAD.03X.05]  128.27,114.81 0 bottom
TP22  ON  [PAD.03X.05]  128.27,122.43 0 bottom
TP23  RSSI  [PAD.03X.05]  156.72,114.81 0 bottom
TP24  ON  [PAD.03X.05]  156.72,122.43 0 bottom
U1  MCP73831  [SOT23-5]  20.83,57.66 90 top
U2  3.3V  [SOT23-5]  20.83,52.58 90 top
U3  ATMEGA328  [TQFP32-08]  20.82,27.82 270 top
U4  XBEE-1B3  [XBEE-SMD]  20.83,71.63 180 bottom
U5  ATMEGA328  [TQFP32-08]  49.27,27.82 270 top
U6  3.3V  [SOT23-5]  49.28,52.58 90 top
U7  XBEE-1B3  [XBEE-SMD]  49.28,71.63 180 bottom
U8  MCP73831  [SOT23-5]  49.28,57.66 90 top
U9  ATMEGA328  [TQFP32-08]  77.71,27.82 270 top
U10  3.3V  [SOT23-5]  77.72,52.58 90 top
U11  XBEE-1B3  [XBEE-SMD]  77.72,71.63 180 bottom
U12  MCP73831  [SOT23-5]  77.72,57.66 90 top
U13  ATMEGA328  [TQFP32-08]  106.16,27.82 270 top
U14  3.3V  [SOT23-5]  106.17,52.58 90 top
U15  XBEE-1B3  [XBEE-SMD]  106.17,71.63 180 bottom
U16  MCP73831  [SOT23-5]  106.17,57.66 90 top
U17  ATMEGA328  [TQFP32-08]  134.61,27.82 270 top
U18  3.3V  [SOT23-5]  134.62,52.58 90 top
U19  XBEE-1B3  [XBEE-SMD]  134.62,71.63 180 bottom
U20  MCP73831  [SOT23-5]  134.62,57.66 90 top
U21  ATMEGA328  [TQFP32-08]  163.06,27.82 270 top
U22  3.3V  [SOT23-5]  163.07,52.58 90 top
U23  XBEE-1B3  [XBEE-SMD]  163.07,71.63 180 bottom
U24  MCP73831  [SOT23-5]  163.07,57.66 90 top
U25  ATMEGA328  [TQFP32-08]  20.82,98.94 270 top
U26  3.3V  [SOT23-5]  20.83,123.7 90 top
U27  XBEE-1B3  [XBEE-SMD]  20.83,142.75 180 bottom
U28  MCP73831  [SOT23-5]  20.83,128.78 90 top
U29  ATMEGA328  [TQFP32-08]  49.27,98.94 270 top
U30  3.3V  [SOT23-5]  49.28,123.7 90 top
U31  XBEE-1B3  [XBEE-SMD]  49.28,142.75 180 bottom
U32  MCP73831  [SOT23-5]  49.28,128.78 90 top
U33  ATMEGA328  [TQFP32-08]  77.71,98.94 270 top
U34  3.3V  [SOT23-5]  77.72,123.7 90 top
U35  XBEE-1B3  [XBEE-SMD]  77.72,142.75 180 bottom
U36  MCP73831  [SOT23-5]  77.72,128.78 90 top
U37  ATMEGA328  [TQFP32-08]  106.16,98.94 270 top
U38  3.3V  [SOT23-5]  106.17,123.7 90 top
U39  XBEE-1B3  [XBEE-SMD]  106.17,142.75 180 bottom
U40  MCP73831  [SOT23-5]  106.17,128.78 90 top
U41  ATMEGA328  [TQFP32-08]  134.61,98.94 270 top
U42  3.3V  [SOT23-5]  134.62,123.7 90 top
U43  XBEE-1B3  [XBEE-SMD]  134.62,142.75 180 bottom
U44  MCP73831  [SOT23-5]  134.62,128.78 90 top
U45  ATMEGA328  [TQFP32-08]  163.06,98.94 270 top
U46  3.3V  [SOT23-5]  163.07,123.7 90 top
U47  XBEE-1B3  [XBEE-SMD]  163.07,142.75 180 bottom
U48  MCP73831  [SOT23-5]  163.07,128.78 90 top
U$1  LOGO-SFENEW  [SFE-NEW-WEBLOGO]  30.35,52.7 0 bottom
U$2  LOGO-SFENEW  [SFE-NEW-WEBLOGO]  58.8,52.7 0 bottom
U$3  FIDUCIAL1X2  [FIDUCIAL-1X2]  55.37,8.64 0 top
U$4  FIDUCIAL1X2  [FIDUCIAL-1X2]  26.92,8.64 0 top
U$5  FIDUCIAL1X2  [FIDUCIAL-1X2]  10.16,67.31 0 top
U$6  FIO_LOGOV2  [FUNNEL_LOGO_BOTTOM_V2]  20.83,11.3 0 top
U$7  FIDUCIAL1X2  [FIDUCIAL-1X2]  38.61,67.31 0 top
U$8  FIO_LOGOV2  [FUNNEL_LOGO_BOTTOM_V2]  49.28,11.3 0 top
U$9  LOGO-SFENEW  [SFE-NEW-WEBLOGO]  87.25,52.7 0 bottom
U$10  FIDUCIAL1X2  [FIDUCIAL-1X2]  83.82,8.64 0 top
U$11  FIDUCIAL1X2  [FIDUCIAL-1X2]  67.06,67.31 0 top
U$12  FIO_LOGOV2  [FUNNEL_LOGO_BOTTOM_V2]  77.72,11.3 0 top
U$13  LOGO-SFENEW  [SFE-NEW-WEBLOGO]  115.7,52.7 0 bottom
U$14  FIDUCIAL1X2  [FIDUCIAL-1X2]  112.27,8.64 0 top
U$15  FIDUCIAL1X2  [FIDUCIAL-1X2]  95.5,67.31 0 top
U$16  FIO_LOGOV2  [FUNNEL_LOGO_BOTTOM_V2]  106.17,11.3 0 top
U$17  LOGO-SFENEW  [SFE-NEW-WEBLOGO]  144.15,52.7 0 bottom
U$18  FIDUCIAL1X2  [FIDUCIAL-1X2]  140.72,8.64 0 top
U$19  FIDUCIAL1X2  [FIDUCIAL-1X2]  123.95,67.31 0 top
U$20  FIO_LOGOV2  [FUNNEL_LOGO_BOTTOM_V2]  134.62,11.3 0 top
U$21  LOGO-SFENEW  [SFE-NEW-WEBLOGO]  172.59,52.7 0 bottom
U$22  FIDUCIAL1X2  [FIDUCIAL-1X2]  169.16,8.64 0 top
U$23  FIDUCIAL1X2  [FIDUCIAL-1X2]  152.4,67.31 0 top
U$24  FIO_LOGOV2  [FUNNEL_LOGO_BOTTOM_V2]  163.07,11.3 0 top
U$25  LOGO-SFENEW  [SFE-NEW-WEBLOGO]  30.35,123.83 0 bottom
U$26  FIDUCIAL1X2  [FIDUCIAL-1X2]  26.92,79.76 0 top
U$27  FIDUCIAL1X2  [FIDUCIAL-1X2]  10.16,138.43 0 top
U$28  FIO_LOGOV2  [FUNNEL_LOGO_BOTTOM_V2]  20.83,82.42 0 top
U$29  LOGO-SFENEW  [SFE-NEW-WEBLOGO]  58.8,123.83 0 bottom
U$30  FIDUCIAL1X2  [FIDUCIAL-1X2]  55.37,79.76 0 top
U$31  FIDUCIAL1X2  [FIDUCIAL-1X2]  38.61,138.43 0 top
U$32  FIO_LOGOV2  [FUNNEL_LOGO_BOTTOM_V2]  49.28,82.42 0 top
U$33  LOGO-SFENEW  [SFE-NEW-WEBLOGO]  87.25,123.83 0 bottom
U$34  FIDUCIAL1X2  [FIDUCIAL-1X2]  83.82,79.76 0 top
U$35  FIDUCIAL1X2  [FIDUCIAL-1X2]  67.06,138.43 0 top
U$36  FIO_LOGOV2  [FUNNEL_LOGO_BOTTOM_V2]  77.72,82.42 0 top
U$37  LOGO-SFENEW  [SFE-NEW-WEBLOGO]  115.7,123.83 0 bottom
U$38  FIDUCIAL1X2  [FIDUCIAL-1X2]  112.27,79.76 0 top
U$39  FIDUCIAL1X2  [FIDUCIAL-1X2]  95.5,138.43 0 top
U$40  FIO_LOGOV2  [FUNNEL_LOGO_BOTTOM_V2]  106.17,82.42 0 top
U$41  LOGO-SFENEW  [SFE-NEW-WEBLOGO]  144.15,123.83 0 bottom
U$42  FIDUCIAL1X2  [FIDUCIAL-1X2]  140.72,79.76 0 top
U$43  FIDUCIAL1X2  [FIDUCIAL-1X2]  123.95,138.43 0 top
U$44  FIO_LOGOV2  [FUNNEL_LOGO_BOTTOM_V2]  134.62,82.42 0 top
U$45  LOGO-SFENEW  [SFE-NEW-WEBLOGO]  172.59,123.83 0 bottom
U$46  FIDUCIAL1X2  [FIDUCIAL-1X2]  169.16,79.76 0 top
U$47  FIDUCIAL1X2  [FIDUCIAL-1X2]  152.4,138.43 0 top
U$48  FIO_LOGOV2  [FUNNEL_LOGO_BOTTOM_V2]  163.07,82.42 0 top
X1  USBSMD  [USB-MINIB]  16.51,66.55 270 top
X2  USBSMD  [USB-MINIB]  44.96,66.55 270 top
X3  USBSMD  [USB-MINIB]  73.41,66.55 270 top
X4  USBSMD  [USB-MINIB]  101.85,66.55 270 top
X5  USBSMD  [USB-MINIB]  130.3,66.55 270 top
X6  USBSMD  [USB-MINIB]  158.75,66.55 270 top
X7  USBSMD  [USB-MINIB]  16.51,137.67 270 top
X8  USBSMD  [USB-MINIB]  44.96,137.67 270 top
X9  USBSMD  [USB-MINIB]  73.41,137.67 270 top
X10  USBSMD  [USB-MINIB]  101.85,137.67 270 top
X11  USBSMD  [USB-MINIB]  130.3,137.67 270 top
X12  USBSMD  [USB-MINIB]  158.75,137.67 270 top
Y1  8MHz  [RESONATOR-SMD]  17.65,34.29 0 top
Y2  8MHz  [RESONATOR-SMD]  46.1,34.29 0 top
Y3  8MHz  [RESONATOR-SMD]  74.55,34.29 0 top
Y4  8MHz  [RESONATOR-SMD]  103,34.29 0 top
Y5  8MHz  [RESONATOR-SMD]  131.44,34.29 0 top
Y6  8MHz  [RESONATOR-SMD]  159.89,34.29 0 top
Y7  8MHz  [RESONATOR-SMD]  17.65,105.41 0 top
Y8  8MHz  [RESONATOR-SMD]  46.1,105.41 0 top
Y9  8MHz  [RESONATOR-SMD]  74.55,105.41 0 top
Y10  8MHz  [RESONATOR-SMD]  103,105.41 0 top
Y11  8MHz  [RESONATOR-SMD]  131.44,105.41 0 top
Y12  8MHz  [RESONATOR-SMD]  159.89,105.41 0 top

## Library data of the parts
C1-C72 D1-D48 F1-F12 JP1-JP108 R1-R84 S1-S24 SJ1-SJ12 TP1-TP24 U1-U48 U$1-U$48 X1-X12 Y1-Y12 = SparkFun
E$1 E$2 = SparkFun-Retired
E$3 E$4 E$7 E$8 FD1-FD24 = SparkFun-Aesthetics

## Nets
A0: JP5.7 U3.23
A1: JP5.8 U3.24
A2: JP5.9 U3.25
A3: JP5.10 U3.26
A4: JP5.11 U3.27
A5: JP5.12 U3.28
A6: JP5.13 U3.19
A7: JP5.14 U3.22
A8: JP13.7 U5.23
A9: JP13.8 U5.24
A10: JP13.9 U5.25
A11: JP13.10 U5.26
A12: JP13.11 U5.27
A13: JP13.12 U5.28
A14: JP13.13 U5.19
A15: JP13.14 U5.22
A16: JP22.7 U9.23
A17: JP22.8 U9.24
A18: JP22.9 U9.25
A19: JP22.10 U9.26
A20: JP22.11 U9.27
A21: JP22.12 U9.28
A22: JP22.13 U9.19
A23: JP22.14 U9.22
A24: JP31.7 U13.23
A25: JP31.8 U13.24
A26: JP31.9 U13.25
A27: JP31.10 U13.26
A28: JP31.11 U13.27
A29: JP31.12 U13.28
A30: JP31.13 U13.19
A31: JP31.14 U13.22
A32: JP40.7 U17.23
A33: JP40.8 U17.24
A34: JP40.9 U17.25
A35: JP40.10 U17.26
A36: JP40.11 U17.27
A37: JP40.12 U17.28
A38: JP40.13 U17.19
A39: JP40.14 U17.22
A40: JP49.7 U21.23
A41: JP49.8 U21.24
A42: JP49.9 U21.25
A43: JP49.10 U21.26
A44: JP49.11 U21.27
A45: JP49.12 U21.28
A46: JP49.13 U21.19
A47: JP49.14 U21.22
A48: JP58.7 U25.23
A49: JP58.8 U25.24
A50: JP58.9 U25.25
A51: JP58.10 U25.26
A52: JP58.11 U25.27
A53: JP58.12 U25.28
A54: JP58.13 U25.19
A55: JP58.14 U25.22
A56: JP67.7 U29.23
A57: JP67.8 U29.24
A58: JP67.9 U29.25
A59: JP67.10 U29.26
A60: JP67.11 U29.27
A61: JP67.12 U29.28
A62: JP67.13 U29.19
A63: JP67.14 U29.22
A64: JP76.7 U33.23
A65: JP76.8 U33.24
A66: JP76.9 U33.25
A67: JP76.10 U33.26
A68: JP76.11 U33.27
A69: JP76.12 U33.28
A70: JP76.13 U33.19
A71: JP76.14 U33.22
A72: JP85.7 U37.23
A73: JP85.8 U37.24
A74: JP85.9 U37.25
A75: JP85.10 U37.26
A76: JP85.11 U37.27
A77: JP85.12 U37.28
A78: JP85.13 U37.19
A79: JP85.14 U37.22
A80: JP94.7 U41.23
A81: JP94.8 U41.24
A82: JP94.9 U41.25
A83: JP94.10 U41.26
A84: JP94.11 U41.27
A85: JP94.12 U41.28
A86: JP94.13 U41.19
A87: JP94.14 U41.22
A88: JP103.7 U45.23
A89: JP103.8 U45.24
A90: JP103.9 U45.25
A91: JP103.10 U45.26
A92: JP103.11 U45.27
A93: JP103.12 U45.28
A94: JP103.13 U45.19
A95: JP103.14 U45.22
AREF: C6.1 JP5.2 U3.20
AREF1: C5.1 JP13.2 U5.20
AREF2: C14.1 JP22.2 U9.20
AREF3: C20.1 JP31.2 U13.20
AREF4: C26.1 JP40.2 U17.20
AREF5: C32.1 JP49.2 U21.20
AREF6: C38.1 JP58.2 U25.20
AREF7: C44.1 JP67.2 U29.20
AREF8: C50.1 JP76.2 U33.20
AREF9: C56.1 JP85.2 U37.20
AREF10: C62.1 JP94.2 U41.20
AREF11: C68.1 JP103.2 U45.20
CTS: JP8.1 U4.12
CTS1: JP17.1 U7.12
CTS2: JP26.1 U11.12
CTS3: JP35.1 U15.12
CTS4: JP44.1 U19.12
CTS5: JP53.1 U23.12
CTS6: JP62.1 U27.12
CTS7: JP71.1 U31.12
CTS8: JP80.1 U35.12
CTS9: JP89.1 U39.12
CTS10: JP98.1 U43.12
CTS11: JP107.1 U47.12
D1: JP11.3 U5.32
D2: JP1.3 U3.32
D3: JP1.4 U3.1
D4: JP1.5 U3.2
D5: JP1.6 U3.9
D6: JP1.7 U3.10
D7: JP1.8 U3.11
D8: JP1.9 U3.12
D9: JP1.10 U3.13
D10: JP1.11 U3.14
D11: JP11.4 U5.1
D12: JP11.5 U5.2
D13: JP11.6 U5.9
D14: JP11.7 U5.10
D15: JP11.9 U5.12
D16: JP11.11 U5.14
D17: JP11.8 U5.11
D18: JP11.10 U5.13
D19: JP20.3 U9.32
D20: JP20.4 U9.1
D21: JP20.5 U9.2
D22: JP20.6 U9.9
D23: JP20.7 U9.10
D24: JP20.9 U9.12
D25: JP20.11 U9.14
D26: JP20.8 U9.11
D27: JP20.10 U9.13
D28: JP29.3 U13.32
D29: JP29.4 U13.1
D30: JP29.5 U13.2
D31: JP29.6 U13.9
D32: JP29.7 U13.10
D33: JP29.9 U13.12
D34: JP29.11 U13.14
D35: JP29.8 U13.11
D36: JP29.10 U13.13
D37: JP38.3 U17.32
D38: JP38.4 U17.1
D39: JP38.5 U17.2
D40: JP38.6 U17.9
D41: JP38.7 U17.10
D42: JP38.9 U17.12
D43: JP38.11 U17.14
D44: JP38.8 U17.11
D45: JP38.10 U17.13
D46: JP47.3 U21.32
D47: JP47.4 U21.1
D48: JP47.5 U21.2
D49: JP47.6 U21.9
D50: JP47.7 U21.10
D51: JP47.9 U21.12
D52: JP47.11 U21.14
D53: JP47.8 U21.11
D54: JP47.10 U21.13
D55: JP56.3 U25.32
D56: JP56.4 U25.1
D57: JP56.5 U25.2
D58: JP56.6 U25.9
D59: JP56.7 U25.10
D60: JP56.9 U25.12
D61: JP56.11 U25.14
D62: JP56.8 U25.11
D63: JP56.10 U25.13
D64: JP65.3 U29.32
D65: JP65.4 U29.1
D66: JP65.5 U29.2
D67: JP65.6 U29.9
D68: JP65.7 U29.10
D69: JP65.9 U29.12
D70: JP65.11 U29.14
D71: JP65.8 U29.11
D72: JP65.10 U29.13
D73: JP74.3 U33.32
D74: JP74.4 U33.1
D75: JP74.5 U33.2
D76: JP74.6 U33.9
D77: JP74.7 U33.10
D78: JP74.9 U33.12
D79: JP74.11 U33.14
D80: JP74.8 U33.11
D81: JP74.10 U33.13
D82: JP83.3 U37.32
D83: JP83.4 U37.1
D84: JP83.5 U37.2
D85: JP83.6 U37.9
D86: JP83.7 U37.10
D87: JP83.9 U37.12
D88: JP83.11 U37.14
D89: JP83.8 U37.11
D90: JP83.10 U37.13
D91: JP92.3 U41.32
D92: JP92.4 U41.1
D93: JP92.5 U41.2
D94: JP92.6 U41.9
D95: JP92.7 U41.10
D96: JP92.9 U41.12
D97: JP92.11 U41.14
D98: JP92.8 U41.11
D99: JP92.10 U41.13
D100: JP101.3 U45.32
D101: JP101.4 U45.1
D102: JP101.5 U45.2
D103: JP101.6 U45.9
D104: JP101.7 U45.10
D105: JP101.9 U45.12
D106: JP101.11 U45.14
D107: JP101.8 U45.11
D108: JP101.10 U45.13
DTR: C3.1 JP5.6 SJ1.2
DTR1: C12.1 JP13.6 SJ2.2
DTR2: C18.1 JP22.6 SJ3.2
DTR3: C24.1 JP31.6 SJ4.2
DTR4: C30.1 JP40.6 SJ5.2
DTR5: C36.1 JP49.6 SJ6.2
DTR6: C42.1 JP58.6 SJ7.2
DTR7: C48.1 JP67.6 SJ8.2
DTR8: C54.1 JP76.6 SJ9.2
DTR9: C60.1 JP85.6 SJ10.2
DTR10: C66.1 JP94.6 SJ11.2
DTR11: C72.1 JP103.6 SJ12.2
GND: C1.C C2.2 C6.2 C9.2 C10.2 D1.C D2.C D3.C JP1.2 JP2.1 JP3.1 JP4.6 JP5.1 JP6.1 R5.2 S1.1 S1.2 U1.2 U2.2 U3.3 U3.5 U3.21 U4.10 X1.GND Y1.2
GND1: C4.2 C5.2 C7.2 C8.2 C11.C D5.C D6.C D7.C JP10.6 JP11.2 JP12.1 JP13.1 JP14.1 JP15.1 R14.2 S3.1 S3.2 U5.3 U5.5 U5.21 U6.2 U7.10 U8.2 X2.GND Y2.2
GND2: C13.2 C14.2 C15.2 C16.2 C17.C D9.C D10.C D11.C JP19.6 JP20.2 JP21.1 JP22.1 JP23.1 JP24.1 R21.2 S5.1 S5.2 U9.3 U9.5 U9.21 U10.2 U11.10 U12.2 X3.GND Y3.2
GND3: C19.2 C20.2 C21.2 C22.2 C23.C D13.C D14.C D15.C JP28.6 JP29.2 JP30.1 JP31.1 JP32.1 JP33.1 R28.2 S7.1 S7.2 U13.3 U13.5 U13.21 U14.2 U15.10 U16.2 X4.GND Y4.2
GND4: C25.2 C26.2 C27.2 C28.2 C29.C D17.C D18.C D19.C JP37.6 JP38.2 JP39.1 JP40.1 JP41.1 JP42.1 R35.2 S9.1 S9.2 U17.3 U17.5 U17.21 U18.2 U19.10 U20.2 X5.GND Y5.2
GND5: C31.2 C32.2 C33.2 C34.2 C35.C D21.C D22.C D23.C JP46.6 JP47.2 JP48.1 JP49.1 JP50.1 JP51.1 R42.2 S11.1 S11.2 U21.3 U21.5 U21.21 U22.2 U23.10 U24.2 X6.GND Y6.2
GND6: C37.2 C38.2 C39.2 C40.2 C41.C D25.C D26.C D27.C JP55.6 JP56.2 JP57.1 JP58.1 JP59.1 JP60.1 R49.2 S13.1 S13.2 U25.3 U25.5 U25.21 U26.2 U27.10 U28.2 X7.GND Y7.2
GND7: C43.2 C44.2 C45.2 C46.2 C47.C D29.C D30.C D31.C JP64.6 JP65.2 JP66.1 JP67.1 JP68.1 JP69.1 R56.2 S15.1 S15.2 U29.3 U29.5 U29.21 U30.2 U31.10 U32.2 X8.GND Y8.2
GND8: C49.2 C50.2 C51.2 C52.2 C53.C D33.C D34.C D35.C JP73.6 JP74.2 JP75.1 JP76.1 JP77.1 JP78.1 R63.2 S17.1 S17.2 U33.3 U33.5 U33.21 U34.2 U35.10 U36.2 X9.GND Y9.2
GND9: C55.2 C56.2 C57.2 C58.2 C59.C D37.C D38.C D39.C JP82.6 JP83.2 JP84.1 JP85.1 JP86.1 JP87.1 R70.2 S19.1 S19.2 U37.3 U37.5 U37.21 U38.2 U39.10 U40.2 X10.GND Y10.2
GND10: C61.2 C62.2 C63.2 C64.2 C65.C D41.C D42.C D43.C JP91.6 JP92.2 JP93.1 JP94.1 JP95.1 JP96.1 R77.2 S21.1 S21.2 U41.3 U41.5 U41.21 U42.2 U43.10 U44.2 X11.GND Y11.2
GND11: C67.2 C68.2 C69.2 C70.2 C71.C D45.C D46.C D47.C JP100.6 JP101.2 JP102.1 JP103.1 JP104.1 JP105.1 R84.2 S23.1 S23.2 U45.3 U45.5 U45.21 U46.2 U47.10 U48.2 X12.GND Y12.2
MISO: JP1.13 JP4.1 U3.16
MISO1: JP10.1 JP11.13 U5.16
MISO2: JP19.1 JP20.13 U9.16
MISO3: JP28.1 JP29.13 U13.16
MISO4: JP37.1 JP38.13 U17.16
MISO5: JP46.1 JP47.13 U21.16
MISO6: JP55.1 JP56.13 U25.16
MISO7: JP64.1 JP65.13 U29.16
MISO8: JP73.1 JP74.13 U33.16
MISO9: JP82.1 JP83.13 U37.16
MISO10: JP91.1 JP92.13 U41.16
MISO11: JP100.1 JP101.13 U45.16
MOSI: JP1.12 JP4.4 U3.15
MOSI1: JP10.4 JP11.12 U5.15
MOSI2: JP19.4 JP20.12 U9.15
MOSI3: JP28.4 JP29.12 U13.15
MOSI4: JP37.4 JP38.12 U17.15
MOSI5: JP46.4 JP47.12 U21.15
MOSI6: JP55.4 JP56.12 U25.15
MOSI7: JP64.4 JP65.12 U29.15
MOSI8: JP73.4 JP74.12 U33.15
MOSI9: JP82.4 JP83.12 U37.15
MOSI10: JP91.4 JP92.12 U41.15
MOSI11: JP100.4 JP101.12 U45.15
N$1: R3.2 TP2.P$1 U4.13
N$2: D1.A R1.2
N$3: D2.A R2.1
N$4: R2.2 TP1.P$1 U4.6
N$5: JP7.1 S2.2 U2.1 U2.3
N$6: D3.A R3.1
N$7: R8.2 U4.3
N$8: D4.C R9.2
N$9: F1.2 JP7.2 S2.3
N$10: U3.7 Y1.3
N$11: R5.1 U1.5
N$12: U3.8 Y1.1
N$13: SJ1.1 U4.17
N$14: R9.1 U1.1
N$15: D5.A R6.1
N$16: R6.2 TP3.P$1 U7.6
N$17: D6.A R7.1
N$18: R7.2 TP4.P$1 U7.13
N$19: U5.7 Y2.3
N$20: U5.8 Y2.1
N$21: D7.A R10.2
N$22: R12.2 U7.3
N$23: JP16.1 S4.2 U6.1 U6.3
N$24: F2.2 JP16.2 S4.3
N$25: SJ2.1 U7.17
N$26: R14.1 U8.5
N$27: R13.1 U8.1
N$28: D8.C R13.2
N$29: D9.A R15.1
N$30: R15.2 TP5.P$1 U11.6
N$31: D10.A R16.1
N$32: R16.2 TP6.P$1 U11.13
N$33: U9.7 Y3.3
N$34: U9.8 Y3.1
N$35: D11.A R17.2
N$36: R19.2 U11.3
N$37: JP25.1 S6.2 U10.1 U10.3
N$38: F3.2 JP25.2 S6.3
N$39: SJ3.1 U11.17
N$40: R21.1 U12.5
N$41: R20.1 U12.1
N$42: D12.C R20.2
N$43: D13.A R22.1
N$44: R22.2 TP7.P$1 U15.6
N$45: D14.A R23.1
N$46: R23.2 TP8.P$1 U15.13
N$47: U13.7 Y4.3
N$48: U13.8 Y4.1
N$49: D15.A R24.2
N$50: R26.2 U15.3
N$51: JP34.1 S8.2 U14.1 U14.3
N$52: F4.2 JP34.2 S8.3
N$53: SJ4.1 U15.17
N$54: R28.1 U16.5
N$55: R27.1 U16.1
N$56: D16.C R27.2
N$57: D17.A R29.1
N$58: R29.2 TP9.P$1 U19.6
N$59: D18.A R30.1
N$60: R30.2 TP10.P$1 U19.13
N$61: U17.7 Y5.3
N$62: U17.8 Y5.1
N$63: D19.A R31.2
N$64: R33.2 U19.3
N$65: JP43.1 S10.2 U18.1 U18.3
N$66: F5.2 JP43.2 S10.3
N$67: SJ5.1 U19.17
N$68: R35.1 U20.5
N$69: R34.1 U20.1
N$70: D20.C R34.2
N$71: D21.A R36.1
N$72: R36.2 TP11.P$1 U23.6
N$73: D22.A R37.1
N$74: R37.2 TP12.P$1 U23.13
N$75: U21.7 Y6.3
N$76: U21.8 Y6.1
N$77: D23.A R38.2
N$78: R40.2 U23.3
N$79: JP52.1 S12.2 U22.1 U22.3
N$80: F6.2 JP52.2 S12.3
N$81: SJ6.1 U23.17
N$82: R42.1 U24.5
N$83: R41.1 U24.1
N$84: D24.C R41.2
N$85: D25.A R43.1
N$86: R43.2 TP13.P$1 U27.6
N$87: D26.A R44.1
N$88: R44.2 TP14.P$1 U27.13
N$89: U25.7 Y7.3
N$90: U25.8 Y7.1
N$91: D27.A R45.2
N$92: R47.2 U27.3
N$93: JP61.1 S14.2 U26.1 U26.3
N$94: F7.2 JP61.2 S14.3
N$95: SJ7.1 U27.17
N$96: R49.1 U28.5
N$97: R48.1 U28.1
N$98: D28.C R48.2
N$99: D29.A R50.1
N$100: R50.2 TP15.P$1 U31.6
N$101: D30.A R51.1
N$102: R51.2 TP16.P$1 U31.13
N$103: U29.7 Y8.3
N$104: U29.8 Y8.1
N$105: D31.A R52.2
N$106: R54.2 U31.3
N$107: JP70.1 S16.2 U30.1 U30.3
N$108: F8.2 JP70.2 S16.3
N$109: SJ8.1 U31.17
N$110: R56.1 U32.5
N$111: R55.1 U32.1
N$112: D32.C R55.2
N$113: D33.A R57.1
N$114: R57.2 TP17.P$1 U35.6
N$115: D34.A R58.1
N$116: R58.2 TP18.P$1 U35.13
N$117: U33.7 Y9.3
N$118: U33.8 Y9.1
N$119: D35.A R59.2
N$120: R61.2 U35.3
N$121: JP79.1 S18.2 U34.1 U34.3
N$122: F9.2 JP79.2 S18.3
N$123: SJ9.1 U35.17
N$124: R63.1 U36.5
N$125: R62.1 U36.1
N$126: D36.C R62.2
N$127: D37.A R64.1
N$128: R64.2 TP19.P$1 U39.6
N$129: D38.A R65.1
N$130: R65.2 TP20.P$1 U39.13
N$131: U37.7 Y10.3
N$132: U37.8 Y10.1
N$133: D39.A R66.2
N$134: R68.2 U39.3
N$135: JP88.1 S20.2 U38.1 U38.3
N$136: F10.2 JP88.2 S20.3
N$137: SJ10.1 U39.17
N$138: R70.1 U40.5
N$139: R69.1 U40.1
N$140: D40.C R69.2
N$141: D41.A R71.1
N$142: R71.2 TP21.P$1 U43.6
N$143: D42.A R72.1
N$144: R72.2 TP22.P$1 U43.13
N$145: U41.7 Y11.3
N$146: U41.8 Y11.1
N$147: D43.A R73.2
N$148: R75.2 U43.3
N$149: JP97.1 S22.2 U42.1 U42.3
N$150: F11.2 JP97.2 S22.3
N$151: SJ11.1 U43.17
N$152: R77.1 U44.5
N$153: R76.1 U44.1
N$154: D44.C R76.2
N$155: D45.A R78.1
N$156: R78.2 TP23.P$1 U47.6
N$157: D46.A R79.1
N$158: R79.2 TP24.P$1 U47.13
N$159: U45.7 Y12.3
N$160: U45.8 Y12.1
N$161: D47.A R80.2
N$162: R82.2 U47.3
N$163: JP106.1 S24.2 U46.1 U46.3
N$164: F12.2 JP106.2 S24.3
N$165: SJ12.1 U47.17
N$166: R84.1 U48.5
N$167: R83.1 U48.1
N$168: D48.C R83.2
RST: C3.2 JP4.5 R4.1 S1.3 S1.4 U3.29
RST1: C12.2 JP10.5 R11.1 S3.3 S3.4 U5.29
RST2: C18.2 JP19.5 R18.1 S5.3 S5.4 U9.29
RST3: C24.2 JP28.5 R25.1 S7.3 S7.4 U13.29
RST4: C30.2 JP37.5 R32.1 S9.3 S9.4 U17.29
RST5: C36.2 JP46.5 R39.1 S11.3 S11.4 U21.29
RST6: C42.2 JP55.5 R46.1 S13.3 S13.4 U25.29
RST7: C48.2 JP64.5 R53.1 S15.3 S15.4 U29.29
RST8: C54.2 JP73.5 R60.1 S17.3 S17.4 U33.29
RST9: C60.2 JP82.5 R67.1 S19.3 S19.4 U37.29
RST10: C66.2 JP91.5 R74.1 S21.3 S21.4 U41.29
RST11: C72.2 JP100.5 R81.1 S23.3 S23.4 U45.29
RXI: JP5.4 U3.30 U4.2
RXI1: JP13.4 U5.30 U7.2
RXI2: JP22.4 U9.30 U11.2
RXI3: JP31.4 U13.30 U15.2
RXI4: JP40.4 U17.30 U19.2
RXI5: JP49.4 U21.30 U23.2
RXI6: JP58.4 U25.30 U27.2
RXI7: JP67.4 U29.30 U31.2
RXI8: JP76.4 U33.30 U35.2
RXI9: JP85.4 U37.30 U39.2
RXI10: JP94.4 U41.30 U43.2
RXI11: JP103.4 U45.30 U47.2
SCK: JP1.14 JP4.3 R1.1 U3.17
SCK1: JP10.3 JP11.14 R10.1 U5.17
SCK2: JP19.3 JP20.14 R17.1 U9.17
SCK3: JP28.3 JP29.14 R24.1 U13.17
SCK4: JP37.3 JP38.14 R31.1 U17.17
SCK5: JP46.3 JP47.14 R38.1 U21.17
SCK6: JP55.3 JP56.14 R45.1 U25.17
SCK7: JP64.3 JP65.14 R52.1 U29.17
SCK8: JP73.3 JP74.14 R59.1 U33.17
SCK9: JP82.3 JP83.14 R66.1 U37.17
SCK10: JP91.3 JP92.14 R73.1 U41.17
SCK11: JP100.3 JP101.14 R80.1 U45.17
SLEEP_RQ: JP9.1 U4.9
SLEEP_RQ1: JP18.1 U7.9
SLEEP_RQ2: JP27.1 U11.9
SLEEP_RQ3: JP36.1 U15.9
SLEEP_RQ4: JP45.1 U19.9
SLEEP_RQ5: JP54.1 U23.9
SLEEP_RQ6: JP63.1 U27.9
SLEEP_RQ7: JP72.1 U31.9
SLEEP_RQ8: JP81.1 U35.9
SLEEP_RQ9: JP90.1 U39.9
SLEEP_RQ10: JP99.1 U43.9
SLEEP_RQ11: JP108.1 U47.9
TXO: JP5.5 R8.1 U3.31
TXO1: JP13.5 R12.1 U5.31
TXO2: JP22.5 R19.1 U9.31
TXO3: JP31.5 R26.1 U13.31
TXO4: JP40.5 R33.1 U17.31
TXO5: JP49.5 R40.1 U21.31
TXO6: JP58.5 R47.1 U25.31
TXO7: JP67.5 R54.1 U29.31
TXO8: JP76.5 R61.1 U33.31
TXO9: JP85.5 R68.1 U37.31
TXO10: JP94.5 R75.1 U41.31
TXO11: JP103.5 R82.1 U45.31
USB_VIN: C9.1 D4.A JP6.2 U1.4 X1.VBUS
USB_VIN1: C7.1 D8.A JP15.2 U8.4 X2.VBUS
USB_VIN2: C15.1 D12.A JP24.2 U12.4 X3.VBUS
USB_VIN3: C21.1 D16.A JP33.2 U16.4 X4.VBUS
USB_VIN4: C27.1 D20.A JP42.2 U20.4 X5.VBUS
USB_VIN5: C33.1 D24.A JP51.2 U24.4 X6.VBUS
USB_VIN6: C39.1 D28.A JP60.2 U28.4 X7.VBUS
USB_VIN7: C45.1 D32.A JP69.2 U32.4 X8.VBUS
USB_VIN8: C51.1 D36.A JP78.2 U36.4 X9.VBUS
USB_VIN9: C57.1 D40.A JP87.2 U40.4 X10.VBUS
USB_VIN10: C63.1 D44.A JP96.2 U44.4 X11.VBUS
USB_VIN11: C69.1 D48.A JP105.2 U48.4 X12.VBUS
VBATT: C10.1 F1.1 JP2.2 JP3.2 U1.3
VBATT1: C8.1 F2.1 JP12.2 JP14.2 U8.3
VBATT2: C16.1 F3.1 JP21.2 JP23.2 U12.3
VBATT3: C22.1 F4.1 JP30.2 JP32.2 U16.3
VBATT4: C28.1 F5.1 JP39.2 JP41.2 U20.3
VBATT5: C34.1 F6.1 JP48.2 JP50.2 U24.3
VBATT6: C40.1 F7.1 JP57.2 JP59.2 U28.3
VBATT7: C46.1 F8.1 JP66.2 JP68.2 U32.3
VBATT8: C52.1 F9.1 JP75.2 JP77.2 U36.3
VBATT9: C58.1 F10.1 JP84.2 JP86.2 U40.3
VBATT10: C64.1 F11.1 JP93.2 JP95.2 U44.3
VBATT11: C70.1 F12.1 JP102.2 JP104.2 U48.3
VCC [VCC]: C1.A C2.1 JP1.1 JP4.2 JP5.3 R4.2 U2.5 U3.4 U3.6 U3.18 U4.1
VCC1 [VCC]: C4.1 C11.A JP10.2 JP11.1 JP13.3 R11.2 U5.4 U5.6 U5.18 U6.5 U7.1
VCC2 [VCC]: C13.1 C17.A JP19.2 JP20.1 JP22.3 R18.2 U9.4 U9.6 U9.18 U10.5 U11.1
VCC3 [VCC]: C19.1 C23.A JP28.2 JP29.1 JP31.3 R25.2 U13.4 U13.6 U13.18 U14.5 U15.1
VCC4 [VCC]: C25.1 C29.A JP37.2 JP38.1 JP40.3 R32.2 U17.4 U17.6 U17.18 U18.5 U19.1
VCC5 [VCC]: C31.1 C35.A JP46.2 JP47.1 JP49.3 R39.2 U21.4 U21.6 U21.18 U22.5 U23.1
VCC6 [VCC]: C37.1 C41.A JP55.2 JP56.1 JP58.3 R46.2 U25.4 U25.6 U25.18 U26.5 U27.1
VCC7 [VCC]: C43.1 C47.A JP64.2 JP65.1 JP67.3 R53.2 U29.4 U29.6 U29.18 U30.5 U31.1
VCC8 [VCC]: C49.1 C53.A JP73.2 JP74.1 JP76.3 R60.2 U33.4 U33.6 U33.18 U34.5 U35.1
VCC9 [VCC]: C55.1 C59.A JP82.2 JP83.1 JP85.3 R67.2 U37.4 U37.6 U37.18 U38.5 U39.1
VCC10 [VCC]: C61.1 C65.A JP91.2 JP92.1 JP94.3 R74.2 U41.4 U41.6 U41.18 U42.5 U43.1
VCC11 [VCC]: C67.1 C71.A JP100.2 JP101.1 JP103.3 R81.2 U45.4 U45.6 U45.18 U46.5 U47.1

## Tracks (layer width: path | path; a pad name or v marks a point on that pad's centre or on a via)
A0
  Top 0.406: U3.23 22.82,22.65 23.37,22.1 29.72,22.1 30.61,22.99 30.61,24.26 JP5.7
A1  (via drill 0.51)
  Top 0.406: U3.24 23.84,23.53 24.64,22.73 29.08,22.73 29.72,23.37 v29.72,24.64
  Bottom 0.406: v29.72,24.64 30.99,24.64 JP5.8
A2  (via drill 0.51)
  Top 0.406: U3.25 25.11,24.16 v25.27,24 | v27.5,21.14 31.94,21.14 JP5.9
  Bottom 0.406: v25.27,24 27.5,21.78 v27.5,21.14
A3  (via drill 0.51)
  Top 0.406: U3.26 25.99,25.82 v26.54,25.27 | v28.45,19.56 29.72,18.29 JP5.10
  Bottom 0.406: v28.45,19.56 28.45,22.1 26.54,24 v26.54,25.27
A4  (via drill 0.51)
  Top 0.406: U3.27 27.1,26.62 v27.5,26.23 | v29.72,17.02 30.99,15.75 JP5.11
  Bottom 0.406: v29.72,17.02 29.72,22.1 27.56,24.26 27.56,26.16 v27.5,26.23
A5  (via drill 0.51)
  Top 0.406: U3.28 28.08,27.42 v28.45,27.05
  Bottom 0.406: v28.45,27.05 28.45,24.51 30.73,22.23 30.73,14.73 JP5.12
A6  (via drill 0.51)
  Top 0.406: U3.19 19.62,21.84 v19.68,21.84
  Bottom 0.406: JP5.13 29.72,13.21 27.18,13.21 24.89,15.49 24.89,19.94 22.99,21.84 v19.68,21.84
A7  (via drill 0.51)
  Top 0.406: U3.22 22.02,25.19 v22.1,25.27 | v25.91,17.02 27.18,17.02 29.72,14.48 29.72,10.67 JP5.14
  Bottom 0.406: v22.1,25.27 22.1,23.69 25.53,20.26 25.53,17.46 25.91,17.08 v25.91,17.02
A8
  Top 0.406: U5.23 51.27,22.65 51.82,22.1 58.17,22.1 59.05,22.99 59.05,24.26 JP13.7
A9  (via drill 0.51)
  Top 0.406: U5.24 52.29,23.53 53.09,22.73 57.53,22.73 58.17,23.37 v58.17,24.64
  Bottom 0.406: v58.17,24.64 59.44,24.64 JP13.8
A10  (via drill 0.51)
  Top 0.406: U5.25 53.56,24.16 v53.72,24 | v55.94,21.14 60.39,21.14 JP13.9
  Bottom 0.406: v53.72,24 55.94,21.78 v55.94,21.14
A11  (via drill 0.51)
  Top 0.406: U5.26 54.44,25.82 v54.99,25.27 | v56.9,19.56 58.17,18.29 JP13.10
  Bottom 0.406: v56.9,19.56 56.9,22.1 54.99,24 v54.99,25.27
A12  (via drill 0.51)
  Top 0.406: U5.27 55.55,26.62 v55.94,26.23 | v58.17,17.02 59.44,15.75 JP13.11
  Bottom 0.406: v58.17,17.02 58.17,22.1 56.01,24.26 56.01,26.16 v55.94,26.23
A13  (via drill 0.51)
  Top 0.406: U5.28 56.52,27.42 v56.9,27.05
  Bottom 0.406: v56.9,27.05 56.9,24.51 59.18,22.23 59.18,14.73 JP13.12
A14  (via drill 0.51)
  Top 0.406: U5.19 48.07,21.84 v48.13,21.84
  Bottom 0.406: JP13.13 58.17,13.21 55.63,13.21 53.34,15.49 53.34,19.94 51.44,21.84 v48.13,21.84
A15  (via drill 0.51)
  Top 0.406: U5.22 50.47,25.19 v50.55,25.27 | v54.36,17.02 55.63,17.02 58.17,14.48 58.17,10.67 JP13.14
  Bottom 0.406: v50.55,25.27 50.55,23.69 53.98,20.26 53.98,17.46 54.36,17.08 v54.36,17.02
A16
  Top 0.406: U9.23 79.71,22.65 80.26,22.1 86.61,22.1 87.5,22.99 87.5,24.26 JP22.7
A17  (via drill 0.51)
  Top 0.406: U9.24 80.74,23.53 81.53,22.73 85.98,22.73 86.61,23.37 v86.61,24.64
  Bottom 0.406: v86.61,24.64 87.88,24.64 JP22.8
A18  (via drill 0.51)
  Top 0.406: U9.25 82.01,24.16 v82.17,24 | v84.39,21.14 88.84,21.14 JP22.9
  Bottom 0.406: v82.17,24 84.39,21.78 v84.39,21.14
A19  (via drill 0.51)
  Top 0.406: U9.26 82.89,25.82 v83.44,25.27 | v85.34,19.56 86.61,18.29 JP22.10
  Bottom 0.406: v85.34,19.56 85.34,22.1 83.44,24 v83.44,25.27
A20  (via drill 0.51)
  Top 0.406: U9.27 83.99,26.62 v84.39,26.23 | v86.61,17.02 87.88,15.75 JP22.11
  Bottom 0.406: v86.61,17.02 86.61,22.1 84.45,24.26 84.45,26.16 v84.39,26.23
A21  (via drill 0.51)
  Top 0.406: U9.28 84.97,27.42 v85.34,27.05
  Bottom 0.406: v85.34,27.05 85.34,24.51 87.63,22.23 87.63,14.73 JP22.12
A22  (via drill 0.51)
  Top 0.406: U9.19 76.51,21.84 v76.58,21.84
  Bottom 0.406: JP22.13 86.61,13.21 84.07,13.21 81.79,15.49 81.79,19.94 79.88,21.84 v76.58,21.84
A23  (via drill 0.51)
  Top 0.406: U9.22 78.91,25.19 v78.99,25.27 | v82.8,17.02 84.07,17.02 86.61,14.48 86.61,10.67 JP22.14
  Bottom 0.406: v78.99,25.27 78.99,23.69 82.42,20.26 82.42,17.46 82.8,17.08 v82.8,17.02
A24
  Top 0.406: U13.23 108.16,22.65 108.71,22.1 115.06,22.1 115.95,22.99 115.95,24.26 JP31.7
A25  (via drill 0.51)
  Top 0.406: U13.24 109.19,23.53 109.98,22.73 114.43,22.73 115.06,23.37 v115.06,24.64
  Bottom 0.406: v115.06,24.64 116.33,24.64 JP31.8
A26  (via drill 0.51)
  Top 0.406: U13.25 110.45,24.16 v110.62,24 | v112.84,21.14 117.28,21.14 JP31.9
  Bottom 0.406: v110.62,24 112.84,21.78 v112.84,21.14
A27  (via drill 0.51)
  Top 0.406: U13.26 111.34,25.82 v111.89,25.27 | v113.79,19.56 115.06,18.29 JP31.10
  Bottom 0.406: v113.79,19.56 113.79,22.1 111.89,24 v111.89,25.27
A28  (via drill 0.51)
  Top 0.406: U13.27 112.44,26.62 v112.84,26.23 | v115.06,17.02 116.33,15.75 JP31.11
  Bottom 0.406: v115.06,17.02 115.06,22.1 112.9,24.26 112.9,26.16 v112.84,26.23
A29  (via drill 0.51)
  Top 0.406: U13.28 113.42,27.42 v113.79,27.05
  Bottom 0.406: v113.79,27.05 113.79,24.51 116.08,22.23 116.08,14.73 JP31.12
A30  (via drill 0.51)
  Top 0.406: U13.19 104.96,21.84 v105.03,21.84
  Bottom 0.406: JP31.13 115.06,13.21 112.52,13.21 110.24,15.49 110.24,19.94 108.33,21.84 v105.03,21.84
A31  (via drill 0.51)
  Top 0.406: U13.22 107.36,25.19 v107.44,25.27 | v111.25,17.02 112.52,17.02 115.06,14.48 115.06,10.67 JP31.14
  Bottom 0.406: v107.44,25.27 107.44,23.69 110.87,20.26 110.87,17.46 111.25,17.08 v111.25,17.02
A32
  Top 0.406: U17.23 136.61,22.65 137.16,22.1 143.51,22.1 144.4,22.99 144.4,24.26 JP40.7
A33  (via drill 0.51)
  Top 0.406: U17.24 137.63,23.53 138.43,22.73 142.88,22.73 143.51,23.37 v143.51,24.64
  Bottom 0.406: v143.51,24.64 144.78,24.64 JP40.8
A34  (via drill 0.51)
  Top 0.406: U17.25 138.9,24.16 v139.06,24 | v141.29,21.14 145.73,21.14 JP40.9
  Bottom 0.406: v139.06,24 141.29,21.78 v141.29,21.14
A35  (via drill 0.51)
  Top 0.406: U17.26 139.78,25.82 v140.34,25.27 | v142.24,19.56 143.51,18.29 JP40.10
  Bottom 0.406: v142.24,19.56 142.24,22.1 140.34,24 v140.34,25.27
A36  (via drill 0.51)
  Top 0.406: U17.27 140.89,26.62 v141.29,26.23 | v143.51,17.02 144.78,15.75 JP40.11
  Bottom 0.406: v143.51,17.02 143.51,22.1 141.35,24.26 141.35,26.16 v141.29,26.23
A37  (via drill 0.51)
  Top 0.406: U17.28 141.87,27.42 v142.24,27.05
  Bottom 0.406: v142.24,27.05 142.24,24.51 144.53,22.23 144.53,14.73 JP40.12
A38  (via drill 0.51)
  Top 0.406: U17.19 133.41,21.84 v133.48,21.84
  Bottom 0.406: JP40.13 143.51,13.21 140.97,13.21 138.68,15.49 138.68,19.94 136.78,21.84 v133.48,21.84
A39  (via drill 0.51)
  Top 0.406: U17.22 135.81,25.19 v135.89,25.27 | v139.7,17.02 140.97,17.02 143.51,14.48 143.51,10.67 JP40.14
  Bottom 0.406: v135.89,25.27 135.89,23.69 139.32,20.26 139.32,17.46 139.7,17.08 v139.7,17.02
A40
  Top 0.406: U21.23 165.06,22.65 165.61,22.1 171.96,22.1 172.85,22.99 172.85,24.26 JP49.7
A41  (via drill 0.51)
  Top 0.406: U21.24 166.08,23.53 166.88,22.73 171.32,22.73 171.96,23.37 v171.96,24.64
  Bottom 0.406: v171.96,24.64 173.23,24.64 JP49.8
A42  (via drill 0.51)
  Top 0.406: U21.25 167.35,24.16 v167.51,24 | v169.74,21.14 174.18,21.14 JP49.9
  Bottom 0.406: v167.51,24 169.74,21.78 v169.74,21.14
A43  (via drill 0.51)
  Top 0.406: U21.26 168.23,25.82 v168.78,25.27 | v170.69,19.56 171.96,18.29 JP49.10
  Bottom 0.406: v170.69,19.56 170.69,22.1 168.78,24 v168.78,25.27
A44  (via drill 0.51)
  Top 0.406: U21.27 169.34,26.62 v169.74,26.23 | v171.96,17.02 173.23,15.75 JP49.11
  Bottom 0.406: v171.96,17.02 171.96,22.1 169.8,24.26 169.8,26.16 v169.74,26.23
A45  (via drill 0.51)
  Top 0.406: U21.28 170.32,27.42 v170.69,27.05
  Bottom 0.406: v170.69,27.05 170.69,24.51 172.97,22.23 172.97,14.73 JP49.12
A46  (via drill 0.51)
  Top 0.406: U21.19 161.86,21.84 v161.93,21.84
  Bottom 0.406: JP49.13 171.96,13.21 169.42,13.21 167.13,15.49 167.13,19.94 165.23,21.84 v161.93,21.84
A47  (via drill 0.51)
  Top 0.406: U21.22 164.26,25.19 v164.34,25.27 | v168.15,17.02 169.42,17.02 171.96,14.48 171.96,10.67 JP49.14
  Bottom 0.406: v164.34,25.27 164.34,23.69 167.77,20.26 167.77,17.46 168.15,17.08 v168.15,17.02
A48
  Top 0.406: U25.23 22.82,93.77 23.37,93.22 29.72,93.22 30.61,94.11 30.61,95.38 JP58.7
A49  (via drill 0.51)
  Top 0.406: U25.24 23.84,94.65 24.64,93.85 29.08,93.85 29.72,94.49 v29.72,95.76
  Bottom 0.406: v29.72,95.76 30.99,95.76 JP58.8
A50  (via drill 0.51)
  Top 0.406: U25.25 25.11,95.28 v25.27,95.12 | v27.5,92.27 31.94,92.27 JP58.9
  Bottom 0.406: v25.27,95.12 27.5,92.9 v27.5,92.27
A51  (via drill 0.51)
  Top 0.406: U25.26 25.99,96.94 v26.54,96.39 | v28.45,90.68 29.72,89.41 JP58.10
  Bottom 0.406: v28.45,90.68 28.45,93.22 26.54,95.12 v26.54,96.39
A52  (via drill 0.51)
  Top 0.406: U25.27 27.1,97.74 v27.5,97.35 | v29.72,88.14 30.99,86.87 JP58.11